# Altium PCB Monitor_Board_Model_H201.PcbDoc (part 1 of 5)
Units mm, origin at the board's own origin, x right, y up, seen from the top; angles counter-clockwise.
Board outline 50 x 40 mm, 6 copper layers (1-SIG-TOP, 2-GND, 3-PWR, 4-SIG-HOR, 5-SIG-VERT, 6-GND-BOT), stack 1.17 mm thick; 210 components, 140 nets, 699 pads, 51 vias.
Unrouted connection lines stored in the file: 491.
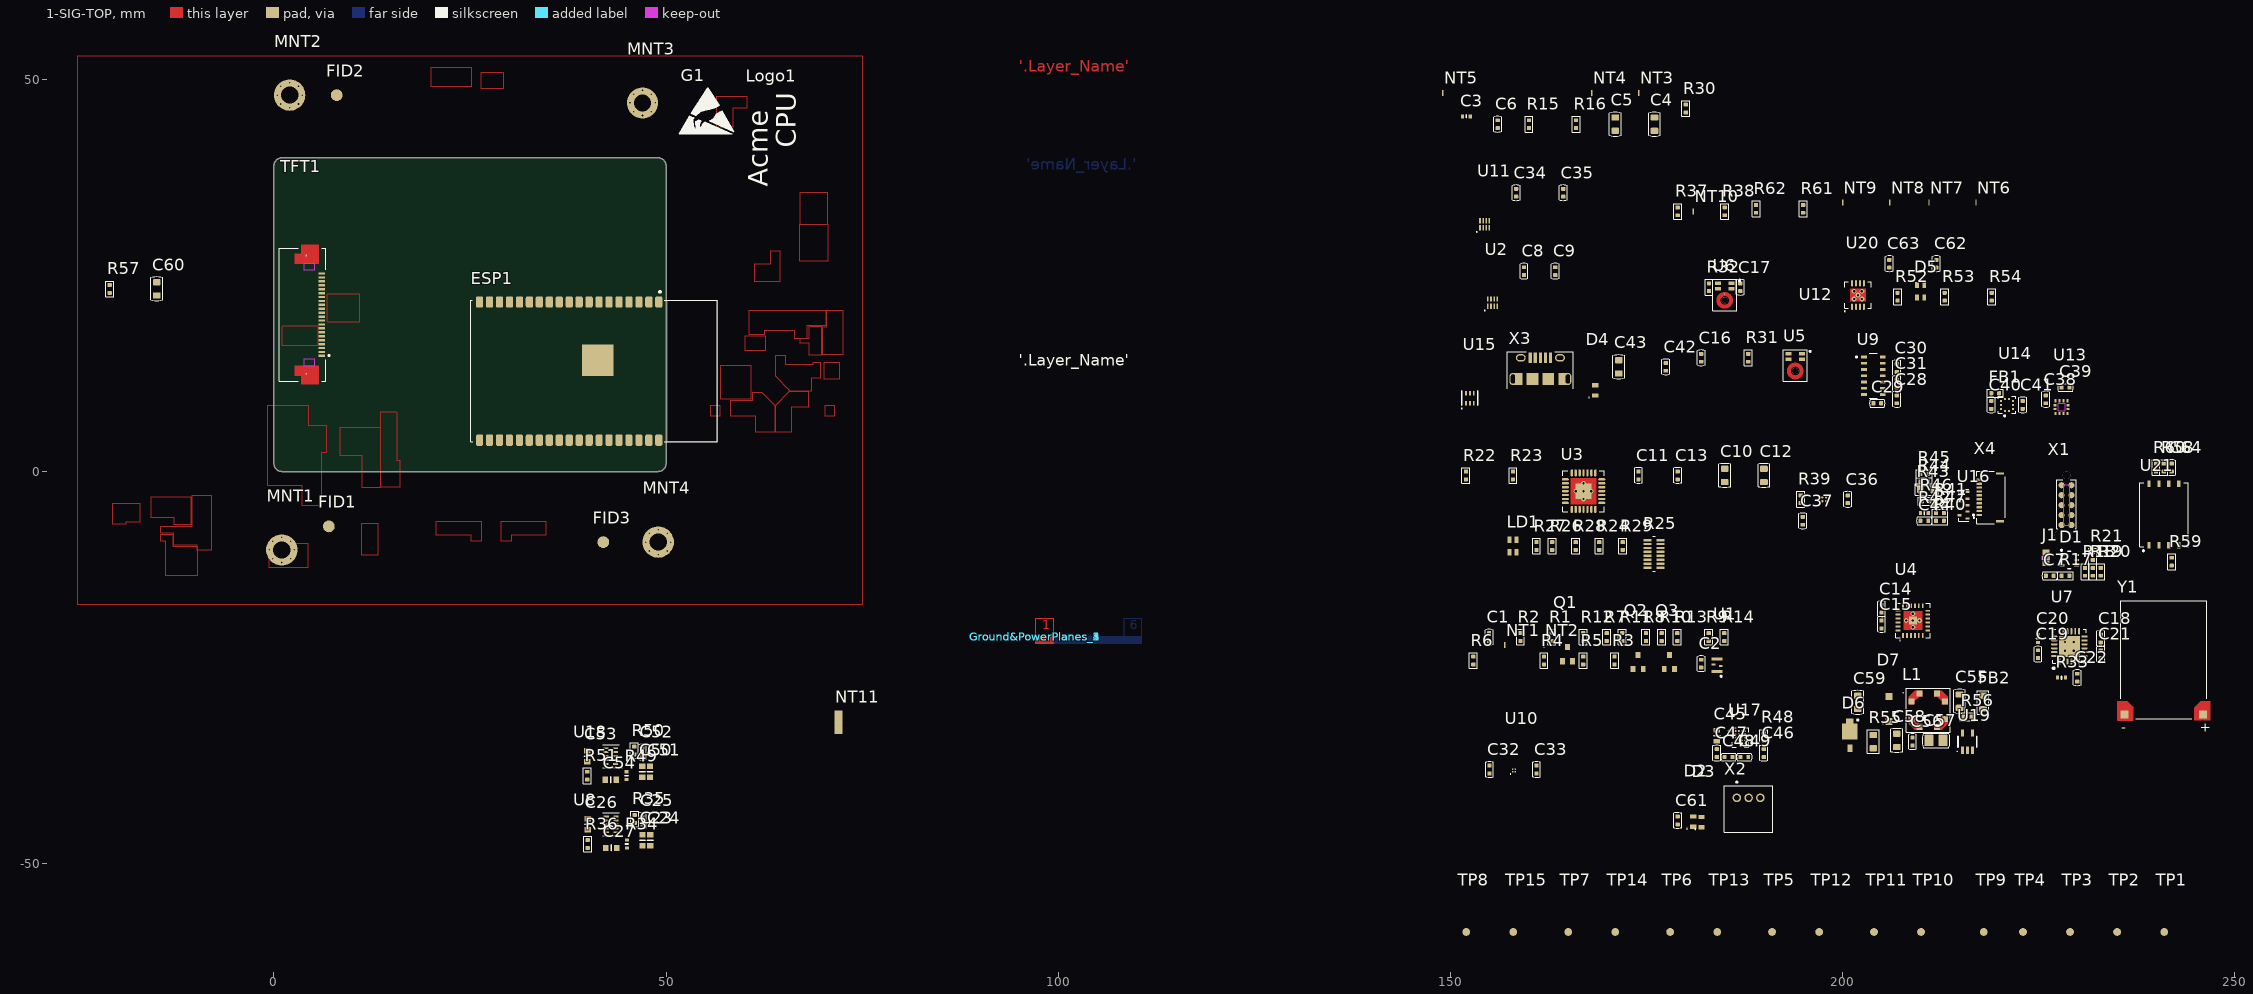
[diagram p0: 1-SIG-TOP view]
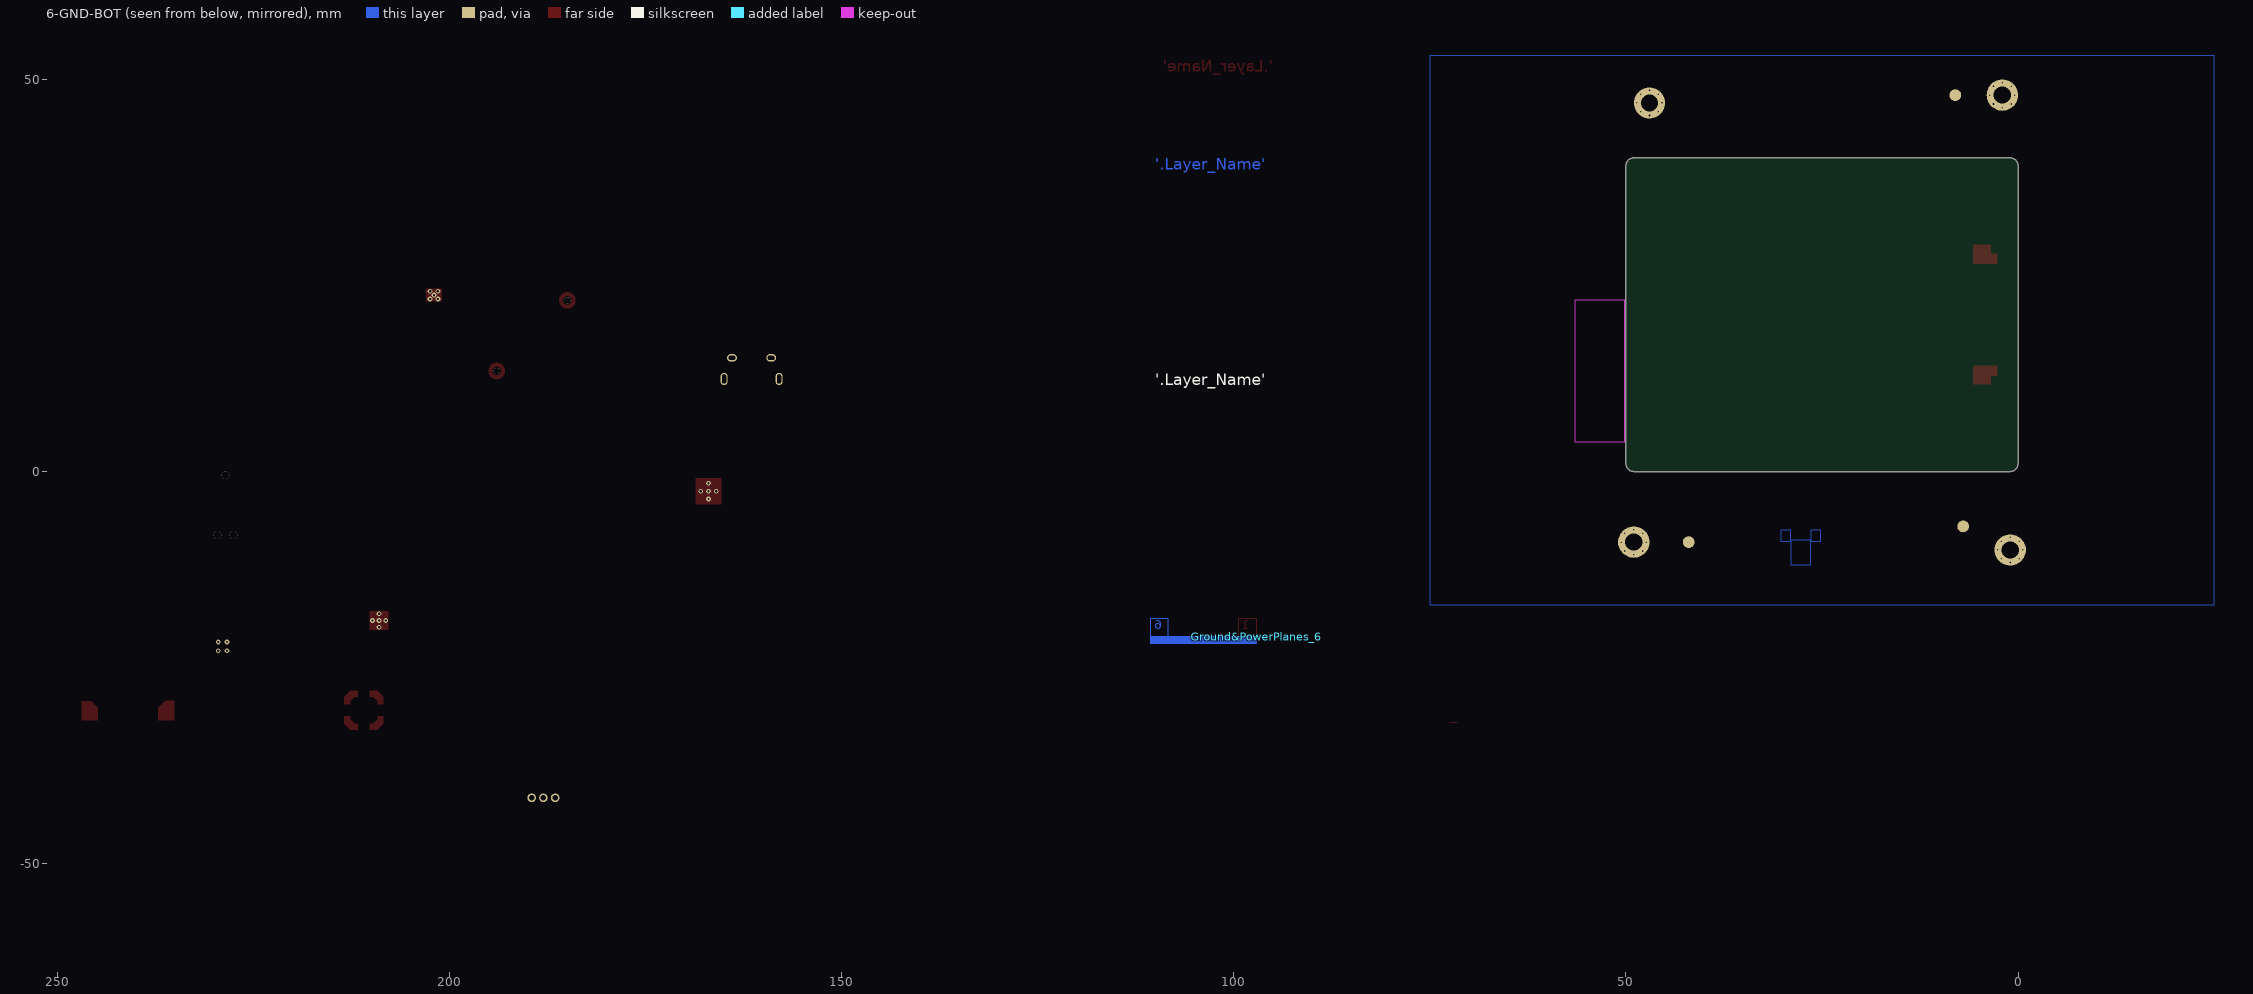
[diagram p1: 6-GND-BOT view, seen from below]
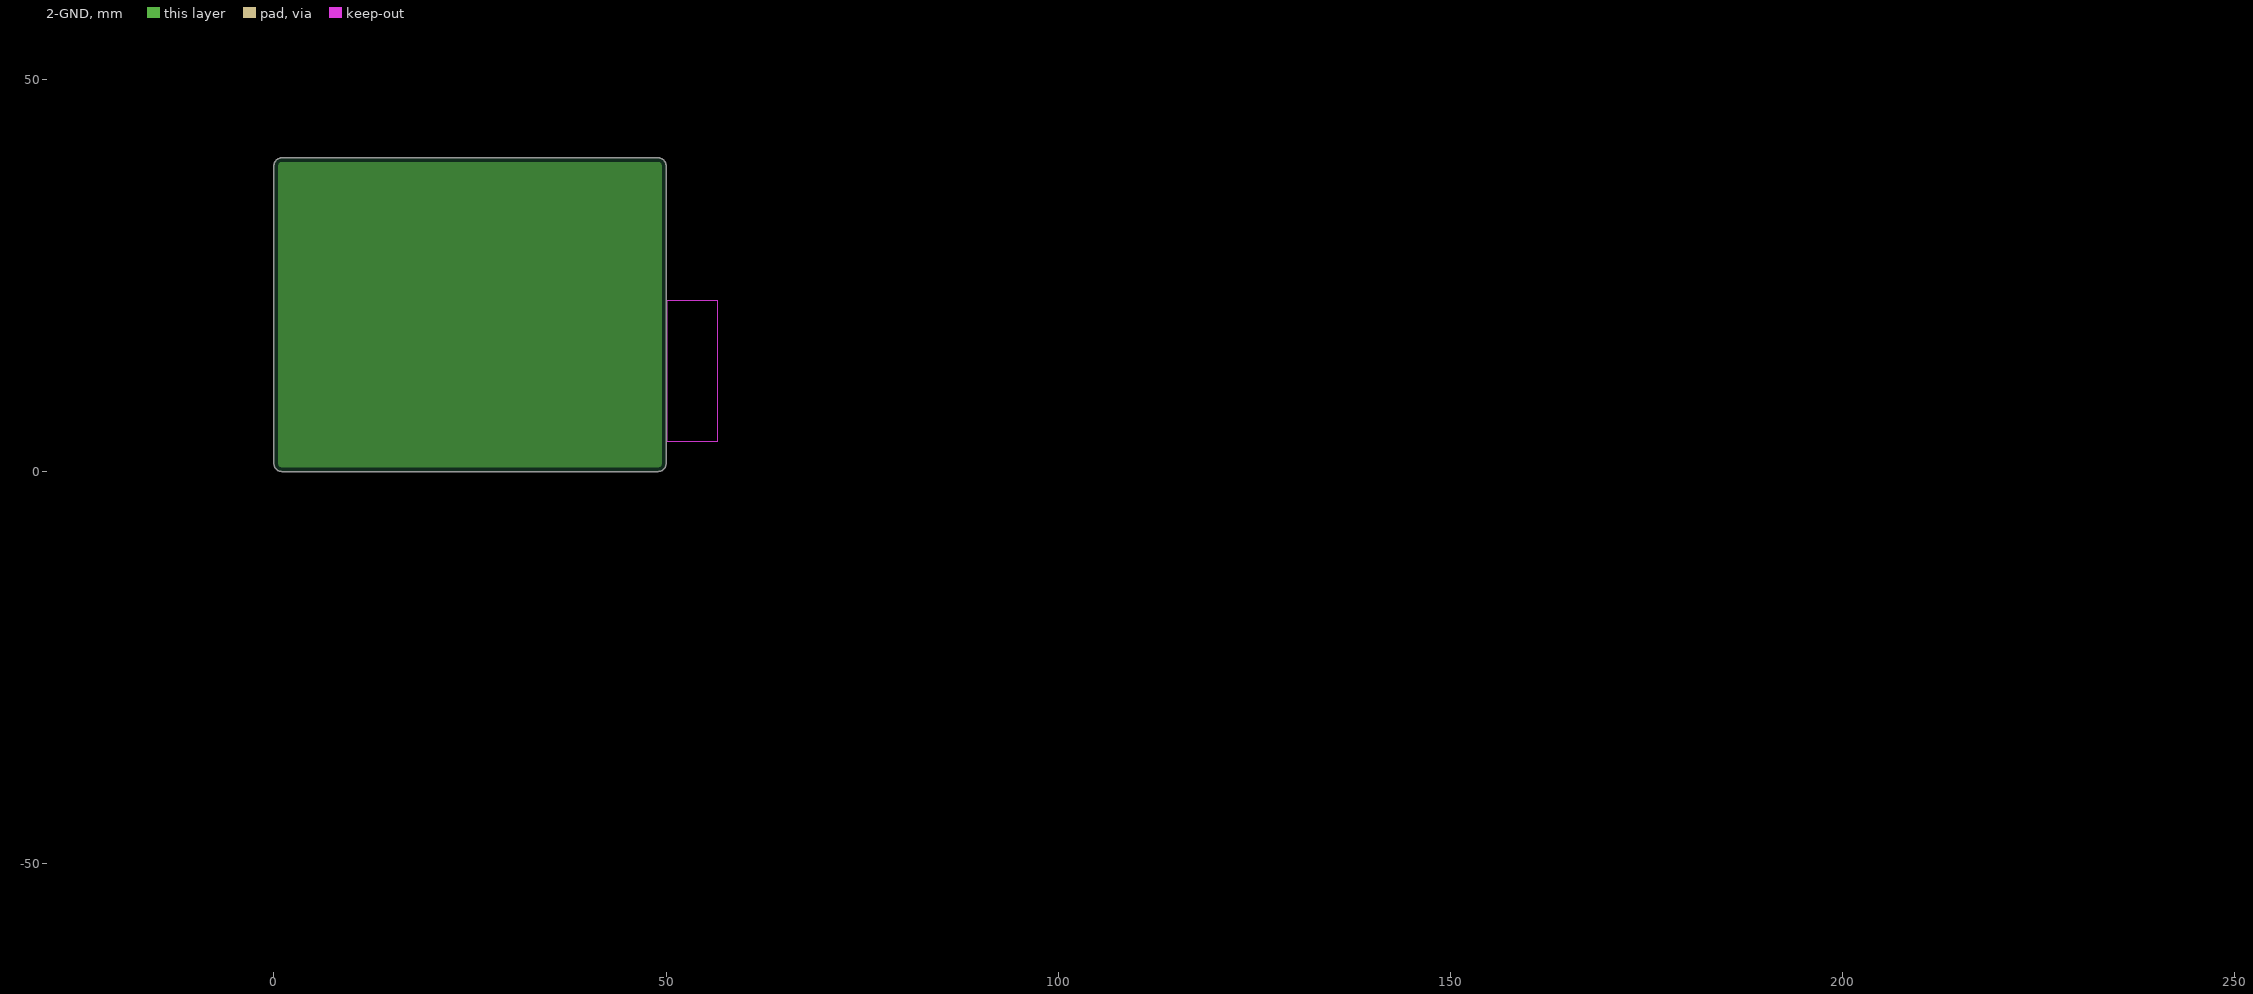
[diagram p2: 2-GND, clearances drawn from the general rule]
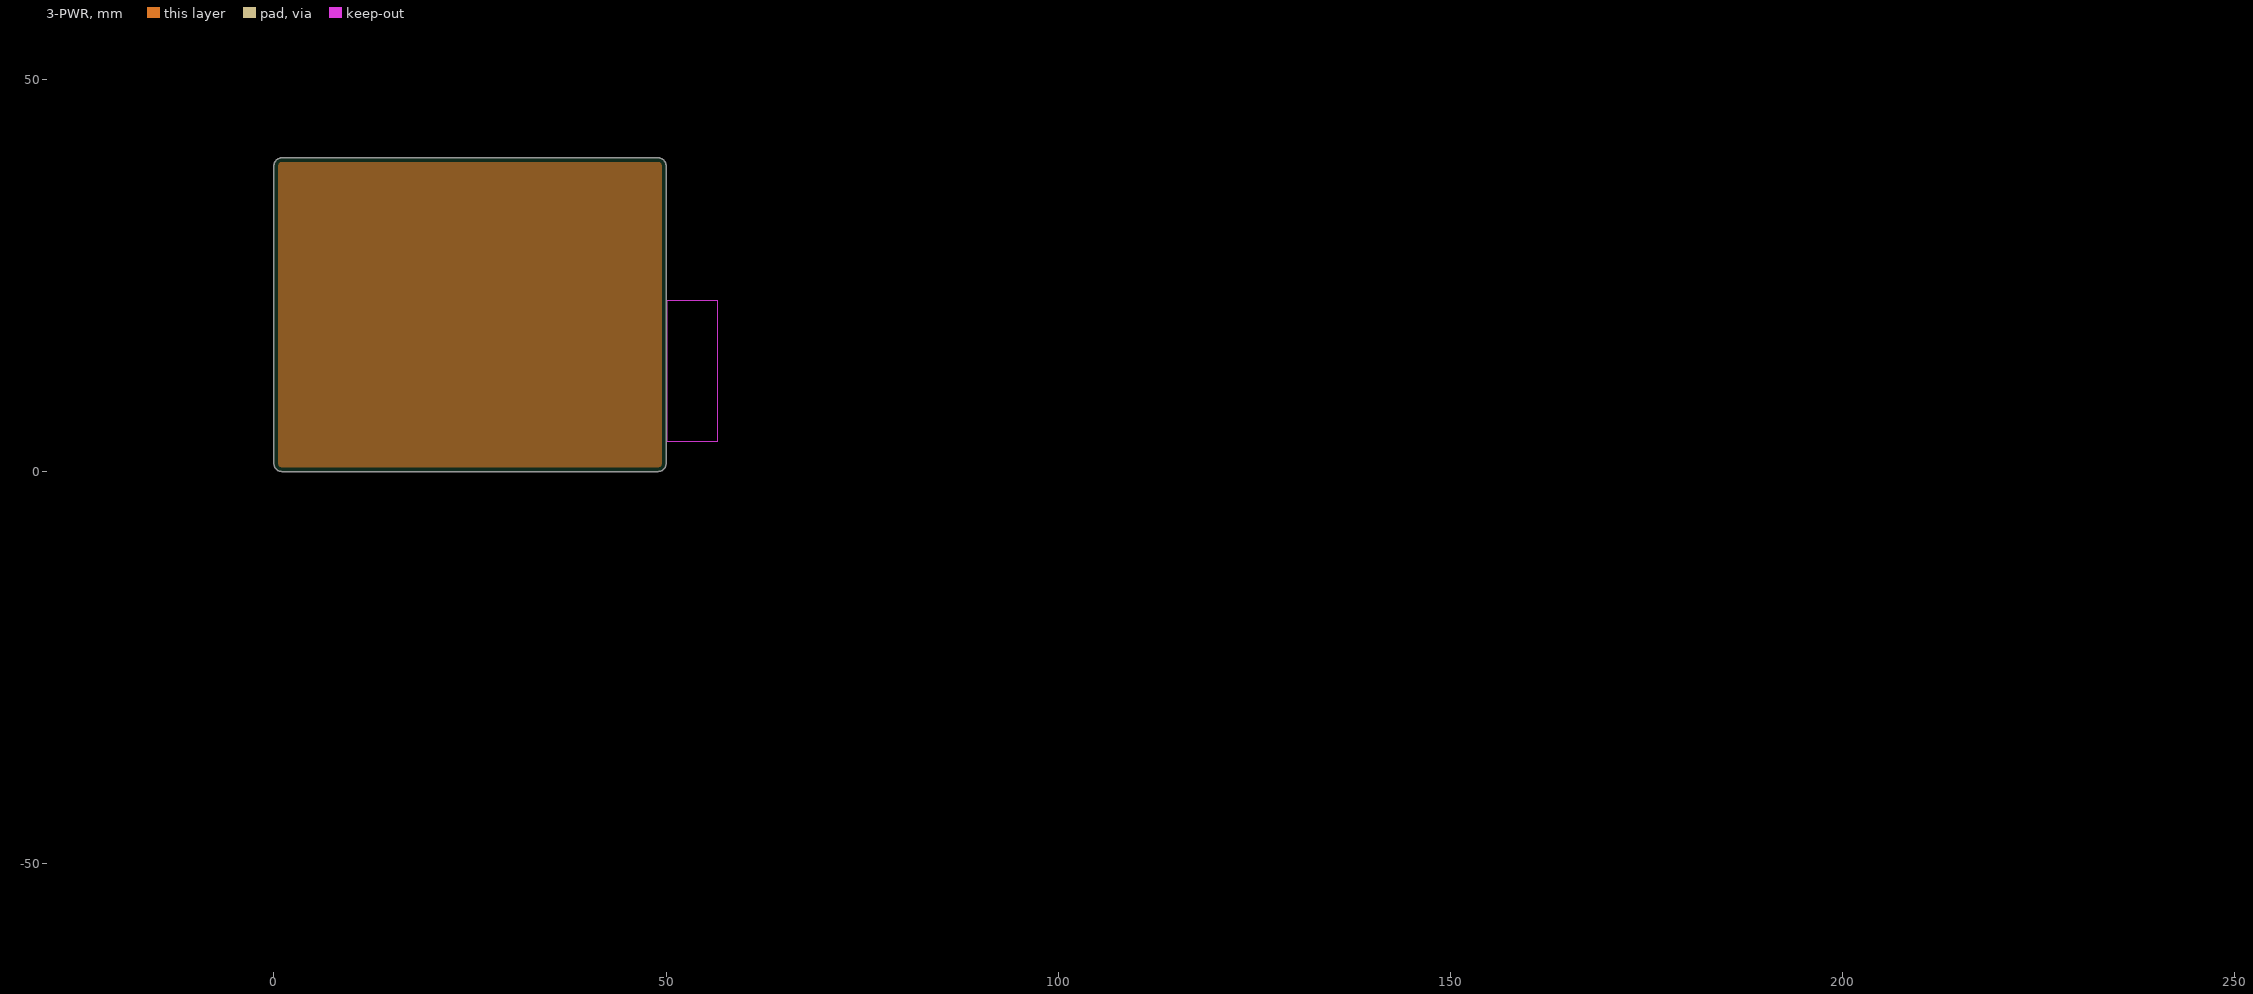
[diagram p3: 3-PWR, clearances drawn from the general rule]
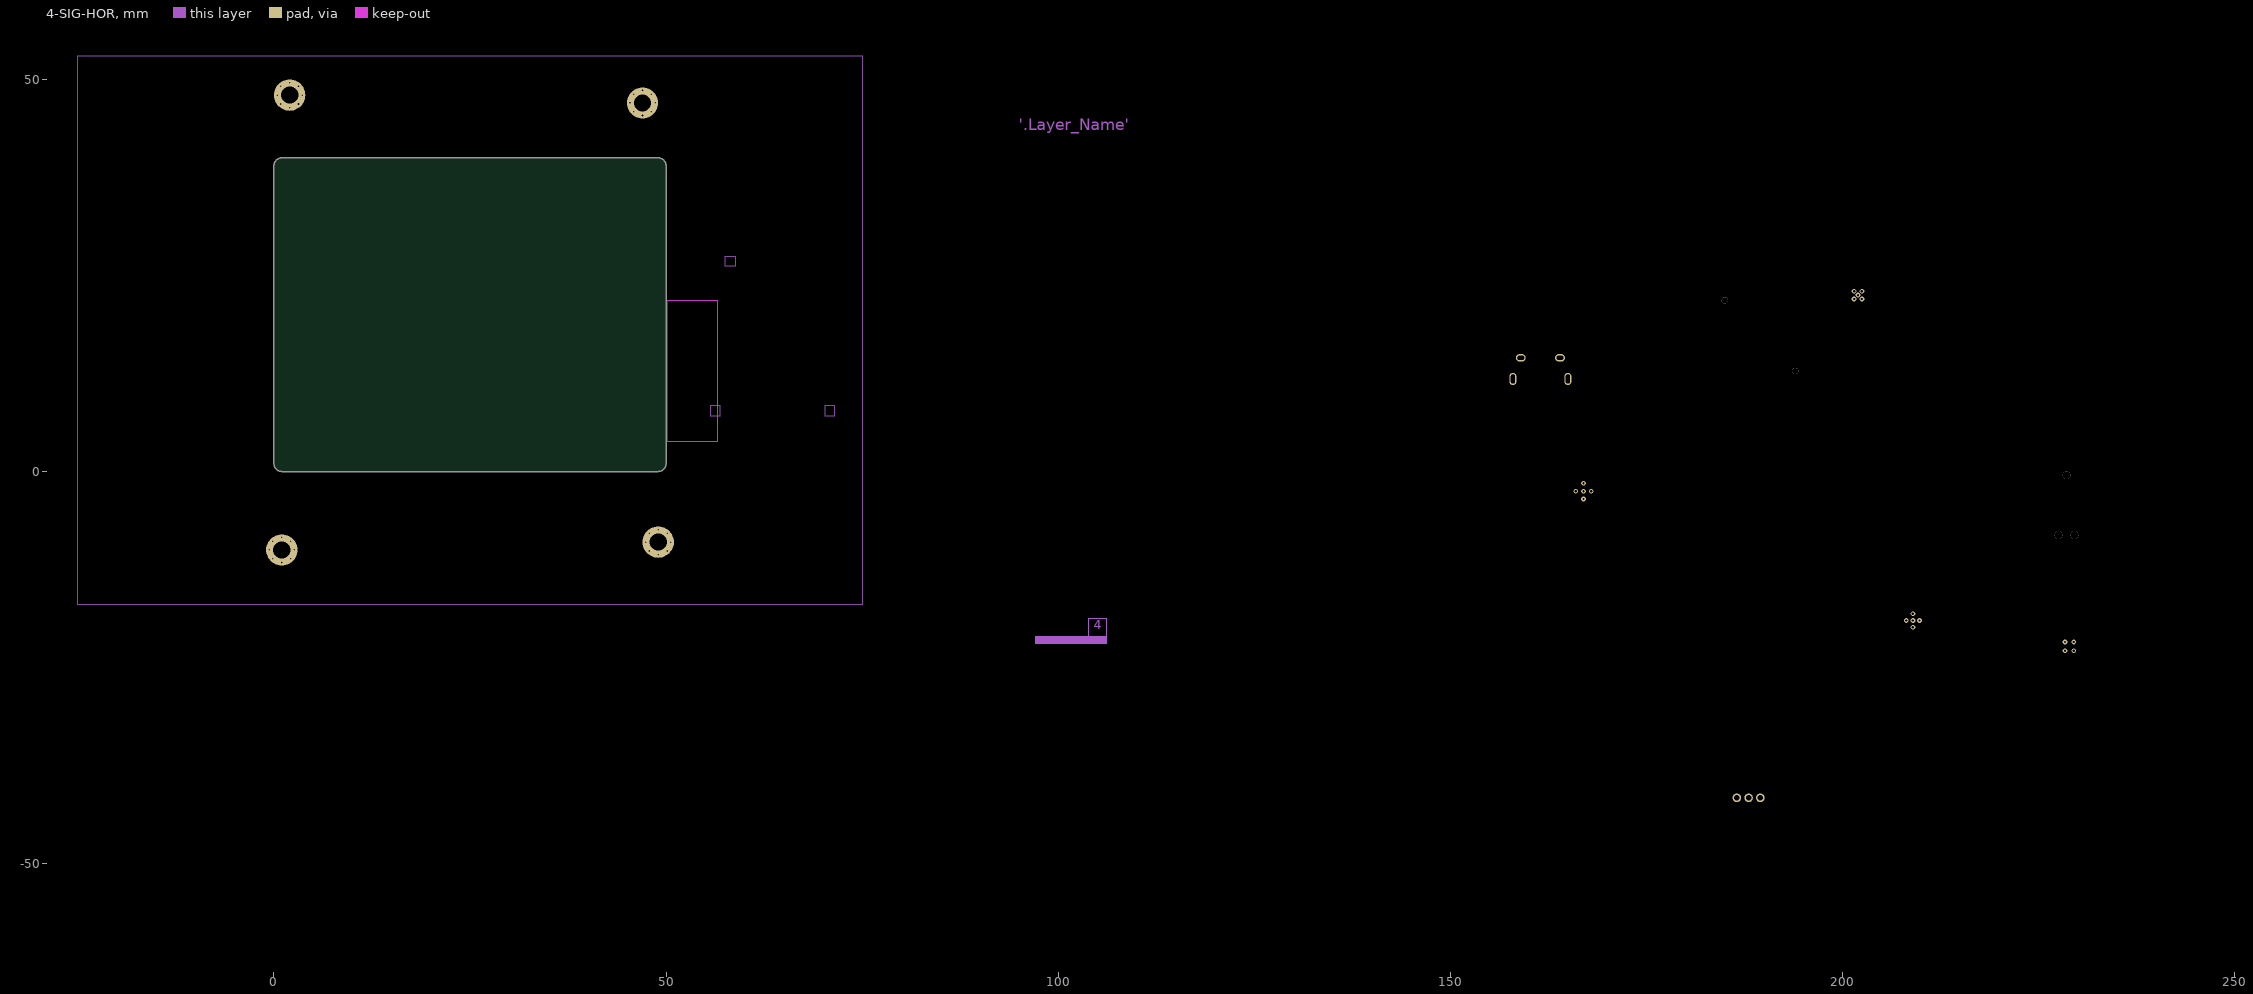
[diagram p4: 4-SIG-HOR]
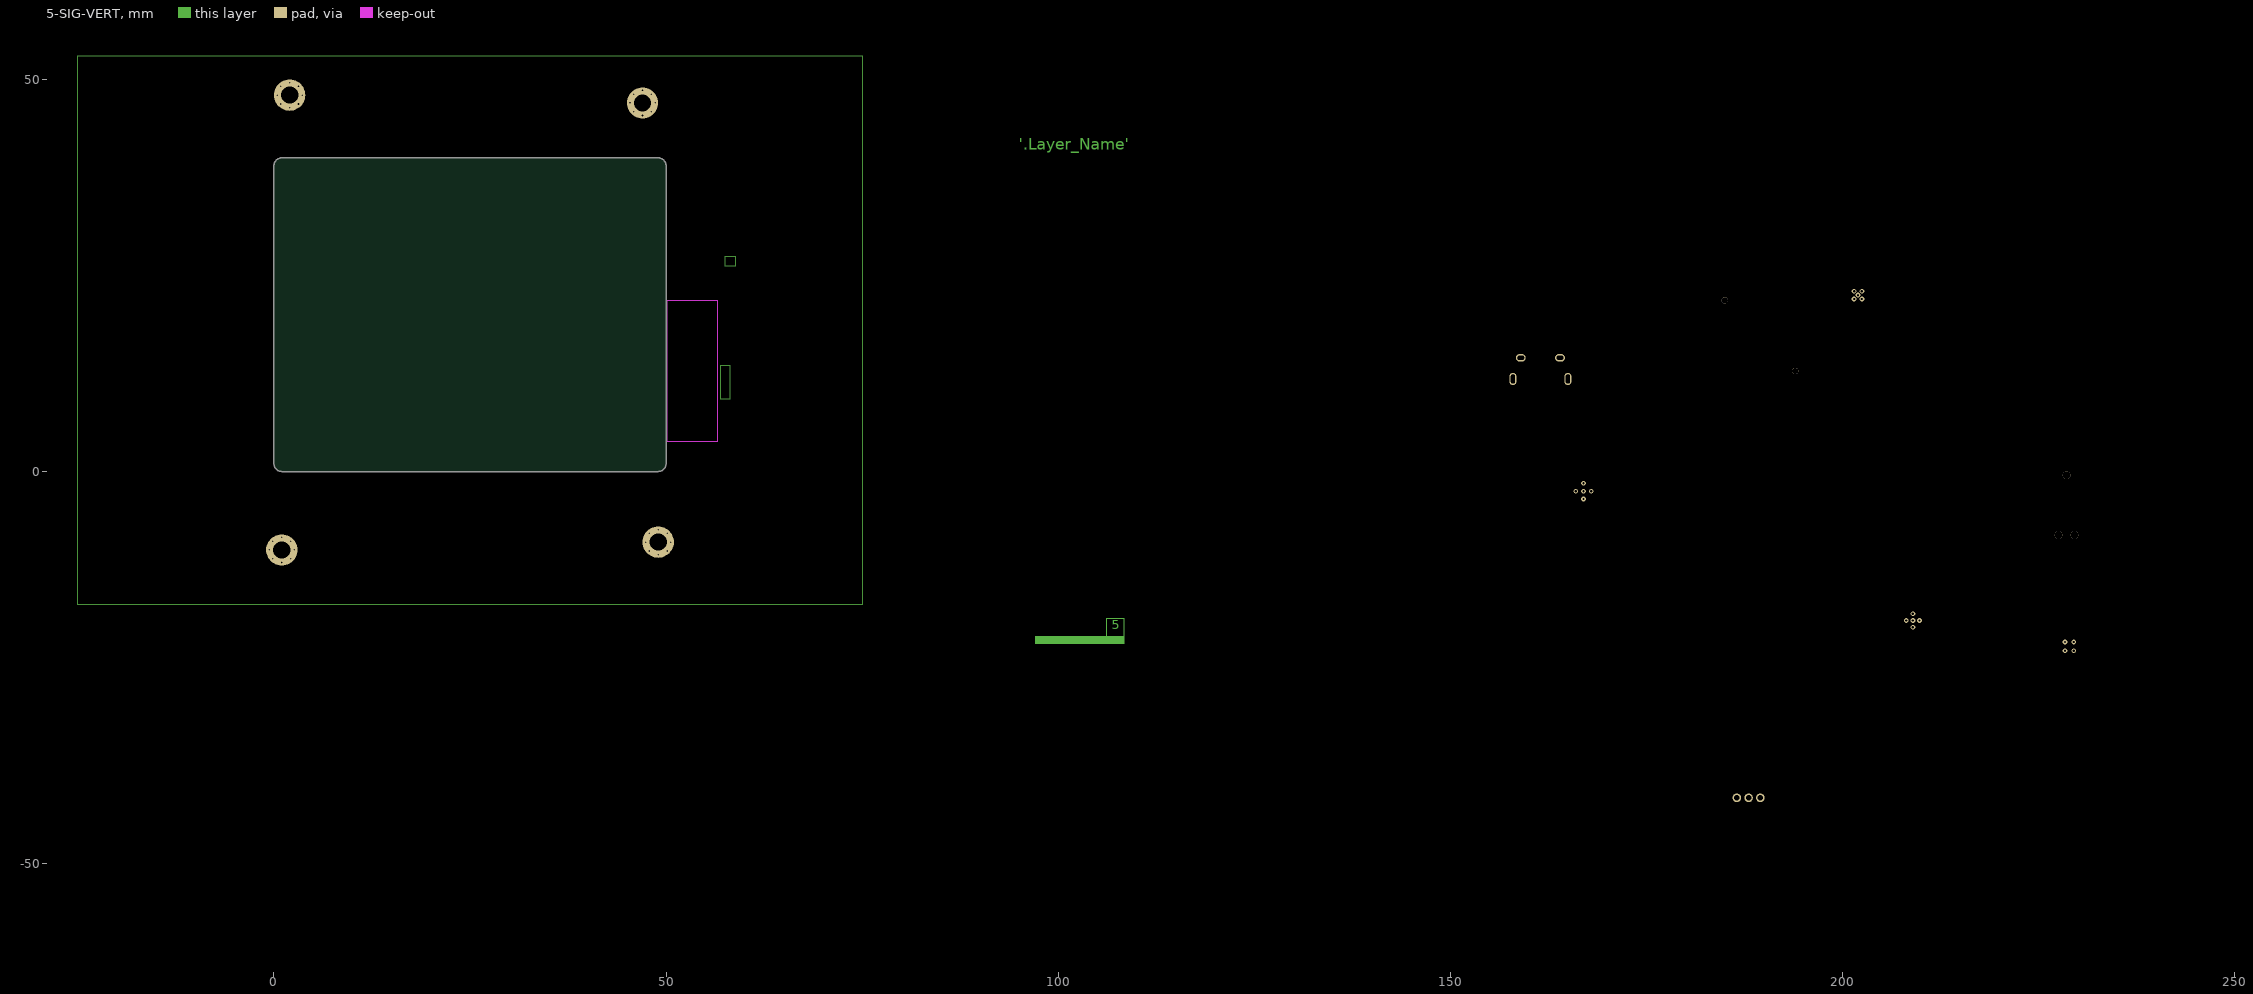
[diagram p5: 5-SIG-VERT]

## Layer stack, top to bottom
Top Solder: solder mask 0.02, Solder Resist, Dk 3.5
1-SIG-TOP: signal copper 0.035
Dielectric 1: prepreg 0.105, FR-4, Dk 4.29
2-GND: plane copper 0.035, net GND
Dielectric 3: core 0.3, FR-4, Dk 3.96
3-PWR: plane copper 0.035, net (Multiple Nets)
Dielectric 2: prepreg 0.15, FR-4, Dk 4.29
4-SIG-HOR: signal copper 0.035
Dielectric 4: core 0.3, FR-4, Dk 3.96
5-SIG-VERT: signal copper 0.035
Dielectric 5: prepreg 0.105, FR-4, Dk 4.29
6-GND-BOT: signal copper 0.035
Bottom Solder: solder mask 0.02, Solder Resist, Dk 3.5

## Board outline
0,1 0,39 cw(c1,39) 1,40 49,40 cw(c49,39) 50,39 50,1 cw(c49,1) 49,0 1,0 cw(c1,1)

## Design rules (kind name [scope] priority, off if disabled: settings)
BoardOutlineClearance BoardOutlineClearance_LayerStack [WithinRoom('PCB_Stackup')] p1: gap=0 ignorepadtopadclearanceinfootprint=FALSE
BoardOutlineClearance BoardOutlineClearance_LayerNames [WithinRoom('Layer_Names')] p2: gap=0 ignorepadtopadclearanceinfootprint=FALSE
BoardOutlineClearance BoardOutlineClearance_uSD_Slot [HasFootprintPad('5025700893','0')] p3: gap=0 ignorepadtopadclearanceinfootprint=FALSE
BoardOutlineClearance BoardOutlineClearance_USB-C_Conn [HasFootprintPad('MOLEX_2012670005','S3') or HasFootprintPad('MOLEX_2012670005','S4')] p4: gap=0 ignorepadtopadclearanceinfootprint=FALSE
BoardOutlineClearance BoardOutlineClearance_nanoSIM_Slot [HasFootprintPad('1042240820_MOL','G4') or HasFootprintPad('1042240820_MOL','G1') or ((ObjectKind = 'Fill') and HasFootprint('1042240820_MOL'))] p5: gap=0 ignorepadtopadclearanceinfootprint=FALSE
BoardOutlineClearance BoardOutlineClearance_Overlays [OnBottomSilkscreen or OnTopSilkscreen] p6: gap=0 ignorepadtopadclearanceinfootprint=FALSE
BoardOutlineClearance [All] p7: gap=0.5 ignorepadtopadclearanceinfootprint=FALSE
Clearance Clearance_InnerLayers [OnLayer('4-SIG-HOR') or OnLayer('5-SIG-VERT')] p1: gap=0.152 ignorepadtopadclearanceinfootprint=TRUE except(0.25: Arc-Hole Track-Hole SMDPad-Hole THPad-Hole Via-Hole Fill-Hole Poly-Hole Region-Hole Text-Hole)
Clearance [All] p2: gap=0.152 ignorepadtopadclearanceinfootprint=FALSE
ComponentClearance ComponentClearance_NetTie [HasFootprint('Net Tie 6x30mil')] p1: gap=0 collisioncheckmode=3 verticalgap=0 showdistances=FALSE
ComponentClearance ComponentClearance_PCB_Stackup [WithinRoom('PCB_Stackup')] p2: gap=0 collisioncheckmode=3 verticalgap=0 showdistances=FALSE
ComponentClearance ComponentClearance_TagConnect [HasFootprint('TC2030-IDC-NL') or HasFootprint('TC2050-IDC-NL')] p3: gap=0 collisioncheckmode=3 verticalgap=0 showdistances=FALSE
ComponentClearance ComponentClearance_Displays [HasFootprint('QG-2864KSWEG01_FLIPPED') vs HasFootprint('CONN_0524352271')] p4: gap=0 collisioncheckmode=3 verticalgap=0 showdistances=FALSE
ComponentClearance [All] p5: gap=0.305 collisioncheckmode=3 verticalgap=1.016 showdistances=FALSE
DiffPairsRouting [All] p1: maxlimit=0.152 minlimit=0.152 mostfreqgap=0.152 toplayer_minwidth=0.152 toplayer_maxwidth=0.152 toplayer_prefwidth=0.152 midlayer1_minwidth=0.152 midlayer1_maxwidth=0.152 midlayer1_prefwidth=0.152 midlayer2_minwidth=0.152 midlayer2_maxwidth=0.152 midlayer2_prefwidth=0.152 bottomlayer_minwidth=0.152 bottomlayer_maxwidth=0.152 bottomlayer_prefwidth=0.152 maxuncoupledlength=12.7
HoleSize [All] p1: absolutevalues=TRUE maxlimit=6.3 minlimit=0.15 maxpercent=80.000 minpercent=20.000
HoleToHoleClearance [All] p1: gap=0.254 allowstackedmicrovias=FALSE
MatchedLengths MatchedLengths_QSPI [InNetClass('QSPI')] p1: tolerance=1.27 checknetsindiffpair=FALSE checkdiffpairvsdiffpair=TRUE checkxsignals=TRUE checkothers=TRUE
MinimumAnnularRing MinimumAnnularRing_Via_Int [IsVia and not (OnTopLayer or OnBottomLayer)] p1: minimumring=0
MinimumAnnularRing [All] p2: minimumring=0.152
MinimumSolderMaskSliver [All] p1: minsoldermaskwidth=0.076
PlaneClearance [All] p1: clearance=0.25
PlaneConnect PlaneConnect_Via [IsVia] p1: planeconnectstyle=Direct reliefexpansion=0.508 reliefentries=4 reliefconductorwidth=0.254 reliefairgap=0.254
PlaneConnect PlaneConnect_HeatTrap [All] p2: pad.planeconnectstyle=Relief pad.reliefexpansion=0.152 pad.reliefentries=4 pad.reliefconductorwidth=0.152 pad.reliefairgap=0.152 via.planeconnectstyle=Direct via.reliefexpansion=0.203 via.reliefentries=4 via.reliefconductorwidth=0.254 via.reliefairgap=0.254
PolygonConnect PolygonConnect_Via [IsVia] p1: connectstyle=Direct reliefconductorwidth=0.254 reliefentries=4 polygonreliefangle="90 Angle" airgapwidth=0.254
PolygonConnect PolygonConnect_TestPoints [InComponentClass('TestPoint')] p2: connectstyle=Direct reliefconductorwidth=0.254 reliefentries=4 polygonreliefangle="90 Angle" airgapwidth=0.254
PolygonConnect PolygonConnect_ThermPads [HasFootprintPad('DFN65P100X40-4N','5')] p3: connectstyle=Direct reliefconductorwidth=0.254 reliefentries=4 polygonreliefangle="90 Angle" airgapwidth=0.254
PolygonConnect PolygonConnect_BG95_GND [HasFootprint('BG95') and (InNet('GND') or InNetClass('BG95_PWR'))] p4: connectstyle=Direct reliefconductorwidth=0.254 reliefentries=4 polygonreliefangle="90 Angle" airgapwidth=0.254
PolygonConnect [All] p5: thpad.connectstyle=Relief thpad.reliefconductorwidth=0.381 thpad.reliefentries=4 thpad.polygonreliefangle="90 Angle" thpad.airgapwidth=0.203 smdpad.connectstyle=Relief smdpad.reliefconductorwidth=0.254 smdpad.reliefentries=4 smdpad.polygonreliefangle="90 Angle" smdpad.airgapwidth=0.203 via.connectstyle=Direct via.reliefconductorwidth=0.254 via.reliefentries=4 via.polygonreliefangle="90 Angle" via.airgapwidth=0.254
RoomDefinition PCB_Stackup [False] p1: confinementstyle=ConfineIn formatcopy=TRUE lockcomponents=FALSE outline 96,-18 112,-18 112,-23 96,-23
RoomDefinition VLT2 [InComponentClass('VLT2')] p2: confinementstyle=ConfineIn formatcopy=TRUE lockcomponents=FALSE outline 152.4,29.55 165.4,29.55 165.4,37.55 152.4,37.55
RoomDefinition VLT1 [InComponentClass('VLT1')] p3: confinementstyle=ConfineIn formatcopy=TRUE lockcomponents=FALSE outline 153.4,19.55 164.4,19.55 164.4,27.55 153.4,27.55
RoomDefinition USB [InComponentClass('USB')] p4: confinementstyle=ConfineIn formatcopy=TRUE lockcomponents=FALSE outline 150.5,7.35 178.5,7.35 178.5,16.35 150.5,16.35
RoomDefinition U_CP2102N_USB-to-UART_Bridge [InComponentClass('U_CP2102N_USB-to-UART_Bridge')] p5: confinementstyle=ConfineIn formatcopy=TRUE lockcomponents=FALSE outline 151.045,-15.71 192.045,-15.71 192.045,2.29 151.045,2.29
RoomDefinition MIC2 [InComponentClass('MIC2')] p6: confinementstyle=ConfineIn formatcopy=TRUE lockcomponents=FALSE outline 171,19.5 188,19.5 188,25.5 171,25.5
RoomDefinition MIC1 [InComponentClass('MIC1')] p7: confinementstyle=ConfineIn formatcopy=TRUE lockcomponents=FALSE outline 181,10.5 197,10.5 197,16.5 181,16.5
RoomDefinition MCU [InComponentClass('MCU')] p8: confinementstyle=ConfineIn formatcopy=TRUE lockcomponents=FALSE outline 152,-27 186,-27 186,-17 152,-17
RoomDefinition LSW [InComponentClass('LSW')] p9: confinementstyle=ConfineIn formatcopy=TRUE lockcomponents=FALSE outline 193,-8 202,-8 202,2 193,2
RoomDefinition K_PAD [InComponentClass('K_PAD')] p10: confinementstyle=ConfineIn formatcopy=TRUE lockcomponents=FALSE outline 208,-8 222,-8 222,2 208,2
RoomDefinition JTAG [InComponentClass('JTAG')] p11: confinementstyle=ConfineIn formatcopy=TRUE lockcomponents=FALSE outline 224,-15 235,-15 235,2 224,2
RoomDefinition HRS1 [InComponentClass('HRS1')] p12: confinementstyle=ConfineIn formatcopy=TRUE lockcomponents=FALSE outline 201,7 208,7 208,16 201,16
RoomDefinition HRMI [InComponentClass('HRMI')] p13: confinementstyle=ConfineIn formatcopy=TRUE lockcomponents=FALSE outline 171,31.178 186,31.178 186,36.178 171,36.178
RoomDefinition HRME [InComponentClass('HRME')] p14: confinementstyle=ConfineIn formatcopy=TRUE lockcomponents=FALSE outline 188,31.5 196,31.5 196,35.5 188,35.5
RoomDefinition FLASH [InComponentClass('FLASH')] p15: confinementstyle=ConfineIn formatcopy=TRUE lockcomponents=FALSE outline 237.045,-13.21 245.045,-13.21 245.045,2.79 237.045,2.79
RoomDefinition DIO [InComponentClass('DIO')] p16: confinementstyle=ConfineIn formatcopy=TRUE lockcomponents=FALSE outline 202,-22 216,-22 216,-15.5 202,-15.5
RoomDefinition CODEC [InComponentClass('CODEC')] p17: confinementstyle=ConfineIn formatcopy=TRUE lockcomponents=FALSE outline 224,-28 234,-28 234,-17 224,-17
RoomDefinition BMP388 [InComponentClass('BMP388')] p18: confinementstyle=ConfineIn formatcopy=TRUE lockcomponents=FALSE outline 218.045,6.29 224.045,6.29 224.045,14.29 218.045,14.29
RoomDefinition BMA253 [InComponentClass('BMA253')] p19: confinementstyle=ConfineIn formatcopy=TRUE lockcomponents=FALSE outline 225,6 230,6 230,14 225,14
RoomDefinition BL_PS [InComponentClass('BL_PS')] p20: confinementstyle=ConfineIn formatcopy=TRUE lockcomponents=FALSE outline 199,-39 220,-39 220,-25 199,-25
RoomDefinition BC [InComponentClass('BC')] p21: confinementstyle=ConfineIn formatcopy=TRUE lockcomponents=FALSE outline 183.045,-38.11 191.045,-38.11 191.045,-31.11 183.045,-31.11
RoomDefinition +3V3_PS2 [InComponentClass('+3V3_PS2')] p22: confinementstyle=ConfineIn formatcopy=TRUE lockcomponents=FALSE outline 37,-41 49,-41 49,-34 37,-34
RoomDefinition +3V3_PS1 [InComponentClass('+3V3_PS1')] p23: confinementstyle=ConfineIn formatcopy=TRUE lockcomponents=FALSE outline 37.045,-49.71 49.045,-49.71 49.045,-42.71 37.045,-42.71
RoomDefinition +1V8_PS1 [InComponentClass('+1V8_PS1')] p24: confinementstyle=ConfineIn formatcopy=TRUE lockcomponents=FALSE outline 154,-40 162,-40 162,-32 154,-32
RoomDefinition Layer_Names [False] p25: confinementstyle=ConfineIn formatcopy=TRUE lockcomponents=FALSE outline 92.5,53 112.5,53 112.5,35.5 92.5,35.5
RoomDefinition LED_DRV [InComponentClass('LED_DRV')] p26: confinementstyle=ConfineIn formatcopy=TRUE lockcomponents=FALSE outline 199,19.5 213,19.5 213,28.5 199,28.5
RoutingVias [All] p1: holewidth=0.15 width=0.5 viastyle="Through Hole" minholewidth=0.15 minwidth=0.5 maxholewidth=0.5 maxwidth=0.7
SilkToSilkClearance [All] p1: silktosilkclearance=0.025
SilkToSolderMaskClearance [IsPad] p1: minsilkscreentomaskgap=0.102 clearancetoexposedcopper=FALSE
SolderMaskExpansion [All] p1: expansion=0.051
Width [All] p1: maxlimit=5.08 minlimit=0.152 preferedwidth=0.254
21 further rules are at their usual default settings.

## Classes and differential pairs
channel class TXS0102_I2C_Bus_Voltage_Translator: VLT1 VLT2
channel class TPSM82822_2A_Buck_Module: +3V3_PS1 +3V3_PS2
channel class IM69D130_MEMS_Microphone: MIC1 MIC2
net class USB: USB.D_N USB.D_P USB_CONN_N USB_CONN_P
net class DIO_[0..15]: DIO_0 DIO_1 DIO_2 DIO_3 DIO_4 DIO_5 DIO_6 DIO_7 DIO_8 DIO_9 DIO_10 DIO_11 DIO_12 DIO_13 DIO_14 DIO_15
component class VLT2: C34 C35 U11
component class VLT1: C8 C9 U2
component class USB: C42 C43 D4 U15 X3
component class U_ESP32-WROOM32D_Module: Q1 Q2 Q3 R1 R2 R3 R4 R7 R8 R13 R14 R37 R38
component class "Net Tie": NT1 NT2 NT3 NT4 NT5 NT6 NT7 NT8 NT9 NT10 NT11
component class MIC2: C17 R32 U6
component class MIC1: C16 R31 U5
component class LSW: C36 C37 R39 U12
component class HRS1: C28 C29 C30 C31 U9
component class HRMI: NT10 R37 R38
component class HRME: R61 R62
component class DIO: C14 C15 U4
component class CODEC: C18 C19 C20 C21 C22 R33 U7
component class BMP388: C40 C41 FB1 U14
component class BMA253: C38 C39 U13
component class +3V3_PS1: C23 C24 C25 C26 C27 R34 R35 R36 U8
component class +1V8_PS1: C32 C33 U10
component class TestPoint: TP1 TP2 TP3 TP4 TP5 TP6 TP7 TP8 TP9 TP10 TP11 TP12 TP13 TP14 TP15 TP25 TP26 TP?
component class FiducialMark: FID1 FID2 FID3
component class MCU: C1 C2 NT1 NT2 Q1 Q2 Q3 R1 R2 R3 R4 R5 R6 R7 R8 R9 R10 R11 R12 R13 R14 U1
component class U_CP2102N_USB-to-UART_Bridge: C10 C11 C12 C13 LD1 R22 R23 R24 R25 R26 R27 R28 R29 U3
component class K_PAD: C44 R40 R41 R42 R43 R44 R45 R46 R47 U16 X4
component class +3V3_PS2: C50 C51 C52 C53 C54 R49 R50 R51 U18
component class JTAG: C7 D1 J1 R17 R18 R19 R20 R21 X1
component class BL_PS: C55 C56 C57 C58 C59 D6 D7 FB2 L1 R55 R56 U19
net class GPIO[0..36]: GPIO0 GPIO1 GPIO2 GPIO3 GPIO4 GPIO5 GPIO12 GPIO13 GPIO14 GPIO15 GPIO18 GPIO19 GPIO21 GPIO22 GPIO23 GPIO25 GPIO26 GPIO27 GPIO32 GPIO33 GPIO34 GPIO35 GPIO36 GPIO39
net class QSPI: GPIO5 GPIO18 GPIO19 GPIO23 QSPI.IO2/WP QSPI.IO3/HD
component class PCB_FEATURE: Logo1
component class BC: C45 C46 C47 C48 C49 R48 U17
component class FLASH: C64 R58 R59 R60 U21
component class LED_DRV: C62 C63 U20
differential pair USB_CONN: +USB_CONN_P -USB_CONN_N
differential pair USB.D: +USB.D_P -USB.D_N

## Components (designator, comment, footprint, x,y, rotation, side; value= is the part's Value field where it differs from the comment)
C1 "CAP CER 0.1UF 50V X7R 0402" C0402 154.955,-21.112 r90 top
C2 "CAP CER 0.1UF 50V X7R 0402" C0402 182,-24.5 r90 top
C3 "CAP CER 1UF 6.3V X5R 0402" CAP_0402 152.045,45.29 r0 top (schematic designator C1)
C4 "CAP CER 10UF 16V X5R 0603" C0603 176.045,44.29 r90 top (schematic designator C2)
C5 "CAP CER 10UF 16V X5R 0603" C0603 171.045,44.29 r90 top (schematic designator C3)
C6 "CAP CER 0.1UF 16V X7R 0402" C0402 156.045,44.29 r90 top (schematic designator C4)
C7 "CAP CER 1UF 6.3V X5R 0402" C0402 226.455,-13.29 r0 top (schematic designator C1)
C8 "CGA2B3X7R1H104K050BB" C0402 159.4,25.55 r90 top (schematic designator C1)
C9 "CGA2B3X7R1H104K050BB" C0402 163.4,25.55 r90 top (schematic designator C2)
C10 "CAP CER 4.7UF 16V X5R 0603" C0603 185,-0.5 r90 top (schematic designator C1)
C11 "CAP CER 0.1UF 16V X7R 0402" C0402 174,-0.5 r90 top (schematic designator C2)
C12 "CAP CER 4.7UF 16V X5R 0603" C0603 190,-0.5 r90 top (schematic designator C3)
C13 "CAP CER 0.1UF 16V X7R 0402" C0402 179,-0.5 r90 top (schematic designator C4)
C14 "CAP CER 2.2UF 6.3V X5R 0402" C0402 205,-17.5 r90 top (schematic designator C1)
C15 "CAP CER 0.1UF 50V X7R 0402" C0402 205,-19.5 r270 top (schematic designator C2)
C16 "CAP CER 0.1UF 50V X7R 0402" C0402 182,14.5 r90 top (schematic designator C3)
C17 "CAP CER 0.1UF 50V X7R 0402" C0402 187,23.5 r90 top (schematic designator C3)
C18 "CAP CER 10nF 25V X7R 10% 0402" C0402 232.955,-21.29 r90 top (schematic designator C4)
C19 "CAP CER 10PF 50V C0G/NP0 0402" C0402 224.955,-23.29 r90 top (schematic designator C5)
C20 "C 100pF 50V C0G, NP0 0402" CAP_0402 224.955,-21.29 r90 top (schematic designator C6)
C21 "CAP CER 10nF 25V X7R 10% 0402" C0402 232.955,-23.29 r90 top (schematic designator C7)
C22 "CAP CER 0.1UF 50V X7R 0402" C0402 229.955,-26.29 r90 top (schematic designator C8)
C23 "CAP CER 10UF 16V X5R 0603" CAPC1608X08N_0603 47,-47 r90 top (schematic designator C1)
C24 "CAP CER 10UF 16V X5R 0603" CAPC1608X08N_0603 48,-47 r90 top (schematic designator C2)
C25 "CAP CER 100PF 50V C0G/NPO 0402" C0402 47,-44.5 r90 top (schematic designator C3)
C26 "CAP CER 10UF 16V X5R 0603" CAPC1608X08N_0603 40,-45 r270 top (schematic designator C4)
C27 "CAP CER 10UF 16V X5R 0603" CAPC1608X08N_0603 43,-48 r180 top (schematic designator C5)
C28 "CAP CER 0.1UF 50V X7R 0402" C0402 206.955,9.21 r90 top (schematic designator C9)
C29 "CAP CER 4.7UF 6.3V X5R 0402" C0402 204.455,8.71 r180 top (schematic designator C10)
C30 "CAP CER 0.1UF 50V X7R 0402" C0402 206.955,13.21 r90 top (schematic designator C11)
C31 "CAP CER 10UF 6.3V X5R 0402" C0402 206.955,11.21 r90 top (schematic designator C12)
C32 "CAP CER 2.2UF 6.3V X5R 0402" C0402 155,-38 r90 top (schematic designator C1)
C33 "CAP CER 2.2UF 6.3V X5R 0402" C0402 161,-38 r90 top (schematic designator C2)
C34 "CGA2B3X7R1H104K050BB" C0402 158.4,35.55 r90 top (schematic designator C1)
C35 "CGA2B3X7R1H104K050BB" C0402 164.4,35.55 r90 top (schematic designator C2)
C36 "CAP CER 1UF 16V X5R 0402" C0402 200.705,-3.54 r90 top (schematic designator C1)
C37 "CAP CER 0.1UF 50V X7R 0402" C0402 194.955,-6.29 r90 top (schematic designator C2)
C38 "CAP CER 0.1UF 50V X7R 0402" C0402 225.955,9.21 r270 top (schematic designator C1)
C39 "CAP CER 0.1UF 50V X7R 0402" C0402 228.455,10.71 r180 top (schematic designator C2)
C40 "CAP CER 0.1UF 16V X7R 0402" C0402 219,8.5 r270 top (schematic designator C1)
C41 "CAP CER 0.1UF 16V X7R 0402" C0402 223,8.5 r90 top (schematic designator C2)
C42 "Value" C0402 177.5,13.35 r90 top (schematic designator C13)
C43 "Value" 0603C 171.5,13.35 r90 top (schematic designator C14)
C44 "CAP CER 0.1UF 50V X7R 0402" C0402 210.455,-6.29 r180 top (schematic designator C15)
C45 "CAP CER 1UF 25V X5R 0603" CAP_0603 184,-33.7 r90 top (schematic designator C16)
C46 "CAP CER 10UF 6.3V X5R 0402" C0402 190,-35.9 r90 top (schematic designator C17)
C47 "CAP CER 4.7UF 6.3V X5R 0402" C0402 184,-35.9 r90 top (schematic designator C18)
C48 "CAP CER 10UF 6.3V X5R 0402" C0402 185.5,-36.4 r180 top (schematic designator C19)
C49 "CAP CER 2.2UF 6.3V X5R 0402" C0402 187.5,-36.4 r180 top (schematic designator C20)
C50 "CAP CER 10UF 16V X5R 0603" CAPC1608X08N_0603 46.955,-38.29 r90 top (schematic designator C1)
C51 "CAP CER 10UF 16V X5R 0603" CAPC1608X08N_0603 47.955,-38.29 r90 top (schematic designator C2)
C52 "CAP CER 100PF 50V C0G/NPO 0402" C0402 46.955,-35.79 r90 top (schematic designator C3)
C53 "CAP CER 10UF 16V X5R 0603" CAPC1608X08N_0603 39.955,-36.29 r270 top (schematic designator C4)
C54 "CAP CER 10UF 16V X5R 0603" CAPC1608X08N_0603 42.955,-39.29 r180 top (schematic designator C5)
C55 "CAP CER 10UF 16V X5R 0603" C0603 214.955,-29.29 r90 top (schematic designator C1)
C56 "CAP CER 0.1UF 50V X7R 0402" C0402 208.955,-34.44 r90 top (schematic designator C2)
C57 "CAP CER 10UF 16V X7R 0805" C0805 211.955,-34.29 r180 top (schematic designator C3)
C58 "CAP CER 10UF 16V X5R 0603" C0603 206.955,-34.29 r90 top (schematic designator C4)
C59 "CAP CER 10UF 16V X5R 0603" C0603 201.955,-29.44 r90 top (schematic designator C5)
C60 "CAP CER 10UF 16V X5R 0603" C0603 -14.955,23.29 r90 top (schematic designator C1)
C61 "CAP CER 0.1UF 16V X7R 0402" C0402 179,-44.5 r90 top (schematic designator C2)
C62 "CAP CER 1UF 16V X5R 0402" C0402 212,26.5 r90 top (schematic designator C1)
C63 "CAP CER 0.1UF 50V X7R 0402" C0402 206,26.5 r90 top (schematic designator C2)
C64 "CAP CER 0.1UF 50V X7R 0402" C0402 242,0.5 r270 top (schematic designator C1)
D1 "SMF05CT1G" SOT363_SOP65P210X265-6N 228.955,-11.29 r0 top
D2 "ESDA7P120-1U1M" ST_QFN_1610 181,-44.65 r90 top (schematic designator D1)
D3 "ESDA7P120-1U1M" ST_QFN_1610 182.045,-44.71 r90 top (schematic designator D2)
D4 "ESDA7P120-1U1M" ST_QFN_1610 168.5,10.35 r90 top (schematic designator D3)
D5 "150066M153000" LED_0606_RGB_WURTH 210,23 r90 top (schematic designator D4)
D6 "STPS120MF" SODFL375X95-2N 200.955,-33.59 r270 top (schematic designator D1)
D7 "MMSZ5226B-7-F" SOD-123 205.955,-30.29 r90 top (schematic designator D2)
ESP1 "ESP32-WROVER-E(16MB)" ESP32-WROVER 40.82,12.81 r270 top (schematic designator ESP32_MOD)
FB1 "FERRITE BEAD 1 KOHM 0402 1LN" L0402 219.5,10 r0 top
FB2 "FERRITE BEAD 470 OHM 0603 1LN" L0603 217.955,-29.44 r90 top (schematic designator FB1)
FID1 "N/A" Fiducial 7,-7 r0 top
FID2 "N/A" Fiducial 8,48 r90 top
FID3 "N/A" Fiducial 42,-9 r90 top
G1 "Logo_ESD" Logo_ESD 55.045,45.29 r0 top
Ground&PowerPlanes_1 "Number & Stacking Stripe" SIGNAL-1 97.079,-21.074 r0 top
Ground&PowerPlanes_2 "Number & Stacking Stripe" PLANE-2 97.079,-21.074 r0 top
Ground&PowerPlanes_3 "Number & Stacking Stripe" PLANE-3 97.079,-21.074 r0 top
Ground&PowerPlanes_4 "Number & Stacking Stripe" SIGNAL-4 97.079,-21.074 r0 top
Ground&PowerPlanes_5 "Number & Stacking Stripe" SIGNAL-5 97.079,-21.074 r0 top
Ground&PowerPlanes_6 "Number & Stacking Stripe" SIGNAL-6 97.079,-21.074 r0 bottom
J1 "NO Bridge" NO_SolderBridge_0603 225.955,-10.99 r90 top
L1 "FIXED IND COUIPLED 6.8UH 1.2A 160 mOHM SMD" IND_LPD5030 210.955,-30.44 r0 top
LD1 "150066M153000" LED_0606_RGB_WURTH 158,-9.5 r90 top
Logo1 "Logo ACME_CPU" LOGO_ACME_CPU 63.045,41.29 r90 top (schematic designator Logo)
MNT1 "MountHole M2. Nothing to buy or mount" MountHole_M2 1,-10 r90 top
MNT2 "MountHole M2. Nothing to buy or mount" MountHole_M2 2,48 r90 top
MNT3 "MountHole M2. Nothing to buy or mount" MountHole_M2 47,47 r90 top
MNT4 "MountHole M2. Nothing to buy or mount" MountHole_M2 49,-9 r90 top
NT1 "Net Tie" "Net Tie 6x30mil" 156.955,-22.112 r90 top net-tie
NT2 "Net Tie" "Net Tie 6x30mil" 161.955,-22.112 r90 top net-tie
NT3 "Net Tie" "Net Tie 6x30mil" 174.045,48.29 r90 top net-tie
NT4 "Net Tie" "Net Tie 6x30mil" 168.045,48.29 r90 top net-tie
NT5 "Net Tie" "Net Tie 6x30mil" 149.045,48.29 r90 top net-tie
NT6 "Net Tie" "Net Tie 6x30mil" 217.045,34.29 r90 top net-tie
NT7 "Net Tie" "Net Tie 6x30mil" 211.045,34.29 r90 top net-tie
NT8 "Net Tie" "Net Tie 6x30mil" 206.045,34.29 r90 top net-tie
NT9 "Net Tie" "Net Tie 6x30mil" 200.045,34.29 r90 top net-tie
NT10 "Net Tie" "Net Tie 6x30mil" 181,33.178 r90 top net-tie
NT11 "Net Tie" "Net Tie 1x3mm" 72,-32 r90 top net-tie
Q1 "BC847CW,115" SOT-323 164.955,-23.29 r90 top
Q2 "BC847CW,115" SOT-323 173.955,-24.29 r90 top
Q3 "BC847CW,115" SOT-323 177.955,-24.29 r90 top
R1 "RES SMD 0 OHM JUMPER 1/16W 0402" R0402 162.955,-21.112 r90 top
R2 "RES SMD 10K OHM 1% 1/16W 0402" R0402 158.955,-21.112 r90 top
R3 "RES SMD 10K OHM 1% 1/16W 0402" R0402 170.955,-24.112 r90 top
R4 "RES SMD 10K OHM 1% 1/16W 0402" R0402 161.955,-24.112 r90 top
R5 "RES SMD 100 OHM 1% 1/16W 0402" 0402R 166.955,-24.112 r90 top
R6 "RES SMD 100 OHM 1% 1/16W 0402" 0402R 152.955,-24.112 r90 top
R7 "RES SMD 2.7K OHM 1% 1/16W 0402" R0402 169.955,-21.112 r90 top
R8 "RES SMD 2.7K OHM 1% 1/16W 0402" R0402 174.955,-21.112 r90 top
R9 "RES SMD 100K OHM 1% 1/16W 0402" 0402R 182.955,-21.112 r90 top
R10 "RES SMD 100K OHM 1% 1/16W 0402" 0402R 176.955,-21.112 r90 top
R11 "RES SMD 100K OHM 1% 1/16W 0402" 0402R 171.955,-21.112 r90 top
R12 "RES SMD 100K OHM 1% 1/16W 0402" 0402R 166.955,-21.112 r90 top
R13 "RES SMD 2.7K OHM 1% 1/16W 0402" R0402 178.955,-21.112 r90 top
R14 "RES SMD 2.7K OHM 1% 1/16W 0402" R0402 184.955,-21.112 r90 top
R15 "RES SMD 100 OHM 1% 1/16W 0402" R0402 160.045,44.29 r90 top (schematic designator R1)
R16 "RES SMD 10K OHM 1% 1/16W 0402" R0402 166.045,44.29 r90 top (schematic designator R2)
R17 "RES SMD 100 OHM 1% 1/16W 0402" R0402 228.455,-13.29 r180 top (schematic designator R1)
R18 "RES SMD 100 OHM 1% 1/16W 0402" R0402 230.955,-12.79 r90 top (schematic designator R2)
R19 "RES SMD 100 OHM 1% 1/16W 0402" R0402 231.955,-12.79 r90 top (schematic designator R3)
R20 "RES SMD 100 OHM 1% 1/16W 0402" R0402 232.955,-12.79 r90 top (schematic designator R4)
R21 "RES SMD 100 OHM 1% 1/16W 0402" R0402 231.955,-10.79 r90 top (schematic designator R5)
R22 "RES SMD 47K OHM 1% 1/16W 0402" R0402 152,-0.5 r90 top (schematic designator R1)
R23 "RES SMD 23.7K OHM 1% 1/16W 0402" R0402 158,-0.5 r90 top (schematic designator R2)
R24 "RES SMD 1K OHM 1% 1/16W 0402" R0402 169,-9.5 r90 top (schematic designator R3)
R25 "RES ARRAY 8 RES 100K OHM 1606" YAG_YC248 176,-10.5 r0 top (schematic designator R4)
R26 "RES SMD 10K OHM 1% 1/16W 0402" R0402 163,-9.5 r90 top (schematic designator R5)
R27 "RES SMD 402 OHM 1% 1/16W 0402" R0402 161,-9.5 r90 top (schematic designator R6)
R28 "RES SMD 402 OHM 1% 1/16W 0402" R0402 166,-9.5 r90 top (schematic designator R7)
R29 "RES SMD 402 OHM 1% 1/16W 0402" R0402 172,-9.5 r90 top (schematic designator R8)
R30 "RES SMD 100 OHM 1% 1/16W 0402" 0402R 180.045,46.29 r90 top (schematic designator R15)
R31 "RES SMD 100 OHM 1% 1/16W 0402" 0402R 188,14.5 r90 top (schematic designator R16)
R32 "RES SMD 100 OHM 1% 1/16W 0402" 0402R 183,23.5 r90 top (schematic designator R16)
R33 "RES SMD 63.4K OHM 1% 1/16W 0402" R_0402 227.955,-26.29 r180 top (schematic designator R17)
R34 "RES SMD 910K OHM 1% 1/16W 0402" R_0402 45,-47.5 r90 top (schematic designator R1)
R35 "RES SMD 390K OHM 1% 1/16W 0402" R0402 46,-44.3 r90 top (schematic designator R2)
R36 "RES SMD 88.7K OHM 1% 1/16W 0402" 0402R 40,-47.5 r90 top (schematic designator R3)
R37 "RES SMD 2.7K OHM 1% 1/16W 0402" R0402 179,33.178 r90 top (schematic designator R18)
R38 "RES SMD 2.7K OHM 1% 1/16W 0402" R0402 185,33.178 r90 top (schematic designator R19)
R39 "RES SMD 10K OHM 1% 1/16W 0402" R0402 194.705,-3.54 r90 top (schematic designator R1)
R40 "RES SMD 10K OHM 1% 1/16W 0402" 0402R 212.455,-6.29 r180 top (schematic designator R22)
R41 "RES SMD 18.2K OHM 1% 1/16W 0402" R_0402 212.455,-4.29 r180 top (schematic designator R23)
R42 "RES SMD 11K OHM 1% 1/16W 0402" R_0402 210.455,-5.29 r0 top (schematic designator R24)
R43 "RES SMD 7.5K OHM 1% 1/10W 0603" R0603 210.805,-2.29 r180 top (schematic designator R25)
R44 "RES SMD 5.36K OHM 1% 1/16W 0402" R0402 210.455,-1.29 r180 top (schematic designator R26)
R45 "RC0402FR-072K7L" R0402 210.455,-0.29 r0 top (schematic designator R27)
R46 "RES SMD 2.7K OHM 1% 1/16W 0402" R0402 210.655,-3.785 r180 top (schematic designator R28)
R47 "RES SMD 1K OHM 1% 1/16W 0402" R0402 212.455,-5.29 r180 top (schematic designator R29)
R48 "RES SMD 5.1K OHM 1% 1/16W 0402" R0402 190,-33.9 r90 top (schematic designator R30)
R49 "RES SMD 910K OHM 1% 1/16W 0402" R_0402 44.955,-38.79 r90 top (schematic designator R1)
R50 "RES SMD 390K OHM 1% 1/16W 0402" R0402 45.955,-35.59 r90 top (schematic designator R2)
R51 "RES SMD 88.7K OHM 1% 1/16W 0402" 0402R 39.955,-38.79 r90 top (schematic designator R3)
R52 "RES SMD 402 OHM 1% 1/16W 0402" R0402 207.045,22.29 r90 top value=22k (schematic designator R31)
R53 "RES SMD 402 OHM 1% 1/16W 0402" R0402 213.045,22.29 r90 top value=22k (schematic designator R32)
R54 "RES SMD 402 OHM 1% 1/16W 0402" R0402 219.045,22.29 r90 top value=22k (schematic designator R33)
R55 "RES SMD 2.26 OHM 1% 1/10W 0603" R0603 203.955,-34.44 r90 top (schematic designator R1)
R56 "RES SMD 63.4K OHM 1% 1/16W 0402" R0402 215.955,-31.29 r180 top (schematic designator R2)
R57 "RES SMD 1K OHM 1% 1/16W 0402" R0402 -20.955,23.29 r90 top (schematic designator R1)
R58 "RES SMD 10K OHM 1% 1/16W 0402" R0402 241,0.5 r90 top (schematic designator R1)
R59 "RES SMD 10K OHM 1% 1/16W 0402" R0402 242,-11.5 r90 top (schematic designator R2)
R60 "RES SMD 10K OHM 1% 1/16W 0402" R0402 240,0.5 r90 top (schematic designator R3)
R61 "DNP*" 0402R 195,33.5 r90 top (schematic designator R20)
R62 "DNP*" 0402R 189,33.5 r90 top (schematic designator R21)
TFT1 "LH200K-IF05" CONN_0524352271 3,20 r0 top (schematic designator TFT)
TP1 "Test Point Pad" Testpoint 241.045,-58.71 r90 top
TP2 "Test Point Pad" Testpoint 235.045,-58.71 r90 top
TP3 "Test Point Pad" Testpoint 229.045,-58.71 r90 top
TP4 "Test Point Pad" Testpoint 223.045,-58.71 r90 top
TP5 "Test Point Pad" Testpoint 191.045,-58.71 r90 top
TP6 "Test Point Pad" Testpoint 178.045,-58.71 r90 top
TP7 "Test Point Pad" Testpoint 165.045,-58.71 r90 top
TP8 "Test Point Pad" Testpoint 152.045,-58.71 r90 top
TP9 "Test Point Pad" Testpoint 218.045,-58.71 r90 top
TP10 "Test Point Pad" Testpoint 210.045,-58.71 r90 top
TP11 "Test Point Pad" Testpoint 204.045,-58.71 r90 top
TP12 "Test Point Pad" Testpoint 197.045,-58.71 r90 top
TP13 "Test Point Pad" Testpoint 184.045,-58.71 r90 top
TP14 "Test Point Pad" Testpoint 171.045,-58.71 r90 top
TP15 "Test Point Pad" Testpoint 158.045,-58.71 r90 top
U1 "IC SIT1533AI-H4-DCC-32.768E MEMS OSC XO 32.7680KHZ LVCMOS" XTAL4_SiT1533_SIT 184.045,-24.71 r90 top
U2 "TXS0102DQMR" DQM8 155.4,21.55 r90 top (schematic designator U1)
U3 "CP2102N-A02-GQFN28R" QFN28_5X5 167,-2.5 r0 top (schematic designator U1)
U4 "PCAL9539AHF,128" "QFN-EP 24" 209,-19 r90 top (schematic designator U1)
U5 "IM69D130V01XTSA1" MIC_IM69D130V01XTSA1 194,13.5 r0 top (schematic designator U2)
U6 "IM69D130V01XTSA1" MIC_IM69D130V01XTSA1 185,22.5 r0 top (schematic designator U2)
U7 "CMX655DQ6" QFN50P400X400X100_HS-25N 228.955,-22.29 r90 top (schematic designator U3)
U8 "TPSM82822SILR" SIL0010D 43,-45 r180 top (schematic designator U1)
U9 "MAX30102EFD+T" XDCR_MAX30101EFD+ 203.955,12.21 r0 top (schematic designator U4)
U10 "LDLN025J18R" Flip-Chip4 158.13,-38.115 r90 top (schematic designator U1)
U11 "TXS0102DQMR" DQM8 154.4,31.55 r90 top (schematic designator U1)
U12 "TPS22930AYZVT" YZV4_TEX 197.705,-3.54 r90 top (schematic designator U1)
U13 "BMA253" LGA12C50P4X4_200X200X100 227.955,8.21 r90 top (schematic designator U1)
U14 "BMP388" QFN_BMP388_BOS 221,8.5 r90 top (schematic designator U1)
U15 "ECMF02-2AMX6" QFN-6L 152.5,9.35 r90 top (schematic designator U5)
U16 "D3V3F8U9LP3810-7" U-DFN3810-9 215.46,-4.29 r180 top (schematic designator U6)
U17 "BQ25157YFPR" YFP0020 187,-33.9 r0 top (schematic designator U7)
U18 "TPSM82822SILR" SIL0010D 42.955,-36.29 r180 top (schematic designator U1)
U19 "TPS61169DCKR" DCK0005A_L 215.955,-34.44 r90 top (schematic designator U1)
U20 "PCA9632TK,118" SOT908-1 202,22.5 r90 top (schematic designator U1)
U21 "MT29F1G01ABAFDWB-IT:F TR" U-PDFN-8_8X6_P127 241,-5.5 r90 top (schematic designator U1)
X1 "JTAG" TC2050-IDC-NL 228.59,-4.29 r0 top
X2 "BATT" CONN_S3B-ZR_JST 188.045,-43.71 r0 top (schematic designator X1)
X3 "10118194-0001LF" 10118194-0001LF 161.5,10.35 r0 top (schematic designator X2)
X4 "CONN 5034801000 FFC FPC 10POS 0.50MM R/A" MOLEX_5034801000 218.955,-3.29 r90 top (schematic designator X3)
Y1 "CMS-151135-078S" SPKR_CMS-151135-078S 241,-24 r0 top

## Footprints (in the part's own frame and the unit in brackets; to place one, negate y for a bottom-side part, rotate by r counter-clockwise, add the part's x,y. Pads: shape width x height; smd on the part's side, far side on the other; paste and mask are expansions set on the pad)
0402R [mm]
  rrect35% 0.5x0.55 smd: 1(-0.5,0) 2(0.5,0)
  silkscreen extent -1,-0.51 1,0.5, body extent -0.53,-0.25 0.53,0.25, height 0.71
0603C [mm]
  rrect35% 0.8x0.991 smd: 1(-0.85,0) 2(0.85,0)
  silkscreen extent -1.52,-0.75 1.52,0.75, body extent -0.87,-0.48 0.87,0.48, height 0.87
10118194-0001LF [mm] "USB - micro B USB 2.0 Receptacle Connector 5 Position Surface Mount, Right Angle; Through Hole"
  rect 0.4x1.35 smd: 1(-1.3,4.15) 2(-0.65,4.15) 3(0,4.15) 4(0.65,4.15) 5(1.3,4.15)
  rrect100% 0.9x1.55 hole 0.5 slot 1.15 at 90 deg: 6(-3.5,1.45) 6(3.5,1.45)
  rect 1.2x1.55 smd: 6(-2.9,1.45) 6(2.9,1.45)
  rrect100% 1.25x0.95 hole 0.55 slot 0.85 at 0 deg: 6(-2.5,4.15) 6(2.5,4.15)
  rect 1.5x1.55 smd: 6(-1,1.45) 6(1,1.45)
  silkscreen extent -4.2,0.2 4.2,4.9, body extent -4.02,-1.25 4.02,4.33, height 2.77
C0402 [mm]
  rrect35% 0.5x0.55 smd: 1(-0.5,0) 2(0.5,0)
  silkscreen extent -1,-0.5 1,0.5, body extent -0.52,-0.28 0.52,0.28, height 0.55
C0603 [mm]
  rrect35% 0.8x0.991 smd: 1(-0.85,0) 2(0.85,0)
  silkscreen extent -1.52,-0.75 1.52,0.75, body extent -0.87,-0.48 0.87,0.48, height 0.87
C0805 [mm]
  rrect15% 1.15x1.45 smd: 1(-0.9,0) 2(0.9,0)
  silkscreen extent -1.78,-0.94 1.77,0.94, body extent -1.1,-0.73 1.1,0.72, height 0.88
CAP_0402 [mm]
  rect 0.4x0.5 smd: 1(-0.5,0) 2(0.5,0)
  silkscreen extent 0,-0.2 0,0.2, body extent -0.5,-0.25 0.5,0.25, height 0.5
CAP_0603 [mm]
  rect 0.6x0.8 smd: 1(-0.7,0) 2(0.7,0)
  silkscreen extent 0,-0.4 0,0.4, body extent -0.75,-0.41 0.75,0.41, height 0.82
CAPC1608X08N_0603 [mm] "Chip Capacitor, 2-Leads, Body 1.60x0.80mm, IPC Medium Density"
  rect 0.7x0.8 smd: 1(-0.7,0) 2(0.7,0)
  silkscreen extent 0,-0.38 0,0.38, body extent -0.87,-0.47 0.88,0.48, height 0.9
CONN_0524352271 [mm] "TFT LCD MODULE"
  rect 0.8x0.3 smd mask+0.05: 1(3.1,-5.25) 2(3.1,-4.75) 3(3.1,-4.25) 4(3.1,-3.75) 5(3.1,-3.25) 6(3.1,-2.75) 7(3.1,-2.25) 8(3.1,-1.75) 9(3.1,-1.25) 10(3.1,-0.75) 11(3.1,-0.25) 12(3.1,0.25) 13(3.1,0.75) 14(3.1,1.25) 15(3.1,1.75) 16(3.1,2.25) 17(3.1,2.75) 18(3.1,3.25) 19(3.1,3.75) 20(3.1,4.25) 21(3.1,4.75) 22(3.1,5.25)
  rect 0.2x0.2 smd mask+0.05: 23(1.1,7.55) 24(1.1,-7.55)
  1-SIG-TOP region: 2.7,6.5 2.7,8.9 0.5,8.9 0.5,7.8 -0.35,7.8 -0.35,6.5
  1-SIG-TOP region: 2.7,-6.5 2.7,-8.9 0.5,-8.9 0.5,-7.8 -0.35,-7.8 -0.35,-6.5
  1-SIG-TOP pour cut-out: -0.55,6.3 -0.55,8 0.3,8 0.3,9.1 2.9,9.1 2.9,6.3 2.2,6.3 2.2,5.7 0.8,5.7 0.8,6.3
  1-SIG-TOP pour cut-out: -0.55,-6.3 -0.55,-8 0.3,-8 0.3,-9.1 2.9,-9.1 2.9,-6.3 2.2,-6.3 2.2,-5.7 0.8,-5.7 0.8,-6.3
  1-SIG-TOP keep-out region: 0.8,5.7 2.2,5.7 2.2,6.5 0.8,6.5
  1-SIG-TOP keep-out region: 0.8,-6.5 2.2,-6.5 2.2,-5.7 0.8,-5.7
  silkscreen extent -2.3,-8.5 4.1,8.5, body extent -2,-17.3 47.3,17.3, height 2.1
CONN_S3B-ZR_JST [mm] "Connector Header Through Hole, Right Angle 3 position 0.059\" (1.50mm)"
  round 1.1 hole 0.7: 1(-1.5,2.1) 2(0,2.1) 3(1.5,2.1)
  silkscreen extent -3.12,-2.29 3.1,4.2, body extent -3,-2.49 3,3.51, height 3.8
DCK0005A_L [mm]
  rect 0.9x0.4 smd paste-0.025 mask+0.05: 1(-1.1,0.65) 2(-1.1,0) 3(-1.1,-0.65) 4(1.1,-0.65) 5(1.1,0.65)
  silkscreen extent -0.7,-1.2 0.7,1.2, body extent -1.05,-1 1.05,1, height 1
DQM8 [mm]
  rect 0.7x0.2 smd mask+0.05: 1(-0.45,0.6) 2(-0.45,0.2) 3(-0.45,-0.2) 4(-0.45,-0.6) 5(0.45,-0.6) 6(0.45,-0.2) 7(0.45,0.2) 8(0.45,0.6)
  silkscreen extent -1.05,0.95 -0.95,1.05, body extent -0.6,-0.9 0.6,0.9, height 0.5
ESP32-WROVER [mm]
  rrect50% 1.45x0.93 smd: 1(-8.81,8.26) 2(-8.81,6.99) 3(-8.81,5.72) 4(-8.81,4.45) 5(-8.81,3.18) 6(-8.81,1.91) 7(-8.81,0.64) 8(-8.81,-0.63) 9(-8.81,-1.9) 10(-8.81,-3.17) 11(-8.81,-4.44) 12(-8.81,-5.71) 13(-8.81,-6.98) 14(-8.81,-8.25) 15(-8.81,-9.52) 16(-8.81,-10.79) 17(-8.81,-12.06) 18(-8.81,-13.33) 19(-8.81,-14.6) 20(8.81,-14.6) 21(8.81,-13.33) 22(8.81,-12.06) 23(8.81,-10.79) 24(8.81,-9.52) 25(8.81,-8.25) 26(8.81,-6.98) 27(8.81,-5.71) 28(8.81,-4.44) 29(8.81,-3.17) 30(8.81,-1.9) 31(8.81,-0.63) 32(8.81,0.64) 33(8.81,1.91) 34(8.81,3.18) 35(8.81,4.45) 36(8.81,5.72) 37(8.81,6.99) 38(8.81,8.26)
  rect 4x4 smd paste-3: 39(-1.38,0.47)
  Keep-Out Layer region: 9,9.324 -9.023,9.324 -9.023,15.7 9,15.7
  Keep-Out Layer region: 9,9.331 -9.03,9.331 -9.03,15.7 9,15.7
  Keep-Out Layer region: 9,9.33 -9.029,9.33 -9.029,15.7 9,15.7
  silkscreen extent -10.22,-15.7 9,15.7, body extent -9,-15.7 9,15.7, height 3.65
Fiducial [mm]
  round 1.5 smd paste+0 mask+0.75: ""(0,0)
  round 1.5 smd far side paste+0 mask+0.75: ""(0,0)
  1-SIG-TOP pour cut-out: 0,1.6 0.158,1.6 0.467,1.538 0.758,1.418 1.02,1.243 1.243,1.02 1.418,0.758 1.538,0.467 1.6,0.158 1.6,0 1.6,0 1.6,-0.158 1.538,-0.467 1.418,-0.758 1.243,-1.02 1.02,-1.243 0.758,-1.418 0.467,-1.539 0.158,-1.6 0,-1.6 -0.158,-1.6 -0.467,-1.538 -0.758,-1.418 -1.02,-1.243 -1.243,-1.02 -1.418,-0.758 -1.538,-0.467 -1.6,-0.158 -1.6,0 -1.6,0.158 -1.538,0.467 -1.418,0.758 -1.243,1.02 -1.02,1.243 -0.758,1.418 -0.467,1.538 -0.158,1.6 0,1.6
  6-GND-BOT pour cut-out: 0,1.6 0.158,1.6 0.467,1.538 0.758,1.418 1.02,1.243 1.243,1.02 1.418,0.758 1.538,0.467 1.6,0.158 1.6,0 1.6,-0.158 1.538,-0.467 1.418,-0.758 1.243,-1.02 1.02,-1.243 0.758,-1.418 0.467,-1.539 0.158,-1.6 0,-1.6 -0.158,-1.6 -0.467,-1.538 -0.758,-1.418 -1.02,-1.243 -1.243,-1.02 -1.418,-0.758 -1.538,-0.467 -1.6,-0.158 -1.6,0 -1.6,0.158 -1.538,0.467 -1.418,0.758 -1.243,1.02 -1.02,1.243 -0.758,1.418 -0.467,1.538 -0.158,1.6 0,1.6
  body extent -1.49,-1.5 1.5,1.5
Flip-Chip4 [mm] "Flip-Chip4, 4-Leads, Body 0.63x0.63mmx0.45mm, Pitch 0.35mm"
  round 0.2 smd mask+0: A1(-0.175,0.175) A2(0.175,0.175) B1(-0.175,-0.175) B2(0.175,-0.175)
  silkscreen extent -0.5,0.41 -0.41,0.5, body extent -0.32,-0.32 0.32,0.32, height 0.45
IND_LPD5030 [mm] "Shielded Coupled Inductors"
  rect 0.75x0.75 smd: 1(-2.125,1.125) 1(-1.125,2.125) 2(-2.125,-1.125) 2(-1.125,-2.125) 3(1.125,-2.125) 3(2.125,-1.125) 4(1.125,2.125) 4(2.125,1.125)
  1-SIG-TOP region: -0.75,-1.75 -0.75,-2.5 -1.7,-2.5 -2.5,-1.7 -2.5,-0.75 -1.75,-0.75 -1.75,-1.151 -1.151,-1.75
  1-SIG-TOP region: 1.75,-0.75 2.5,-0.75 2.5,-1.7 1.7,-2.5 0.75,-2.5 0.75,-1.75 1.151,-1.75 1.75,-1.151
  1-SIG-TOP region: 0.75,1.75 0.75,2.5 1.7,2.5 2.5,1.7 2.5,0.75 1.75,0.75 1.75,1.151 1.151,1.75
  1-SIG-TOP region: -1.75,0.75 -2.5,0.75 -2.5,1.7 -1.7,2.5 -0.75,2.5 -0.75,1.75 -1.151,1.75 -1.75,1.151
  silkscreen extent -2.8,-2.8 2.8,2.8, body extent -2.44,-2.44 2.44,2.44, height 2.98
L0402 [mm]
  rrect35% 0.5x0.55 smd: 1(-0.5,0) 2(0.5,0)
  silkscreen extent -1,-0.51 1,0.5, body extent -0.53,-0.25 0.53,0.25, height 0.71
L0603 [mm]
  rrect35% 0.8x1 smd: 1(-0.85,0) 2(0.85,0)
  silkscreen extent -1.5,-0.75 1.5,0.75, body extent -0.8,-0.4 0.8,0.4, height 0.8
LED_0606_RGB_WURTH [mm] "Chip; Body 1.6 x 1.6 mm (LxW typ) WURTH"
  rect 0.8x0.5 smd: A(-0.8,0.45) BK(-0.8,-0.45) GK(0.8,-0.45) RK(0.8,0.45)
  body extent -0.8,-0.8 0.8,0.8, height 0.4
LGA12C50P4X4_200X200X100 [mm] "LGA, 12-Leads, Body 2.00x2.00mmx1.00mm, Pitch 0.50mm"
  rect 0.41x0.28 smd mask+0.05: 1(-0.815,0.75) 2(-0.815,0.25) 3(-0.815,-0.25) 4(-0.815,-0.75) 7(0.815,-0.75) 8(0.815,-0.25) 9(0.815,0.25) 10(0.815,0.75)
  rect 0.28x0.41 smd mask+0.05: 5(-0.25,-0.815) 6(0.25,-0.815) 11(0.25,0.815) 12(-0.25,0.815)
  1-SIG-TOP keep-out region: -0.457,-0.457 0.457,-0.457 0.457,0.457 -0.457,0.457
  body extent -1.04,-1.04 1.04,1.04, height 1
LOGO_ACME_CPU [mm]
Logo_ESD [mm] "Silk only"
  silkscreen extent -3.34,-2.24 3.61,3.67
MIC_IM69D130V01XTSA1 [mm]
  rect 0.75x0.45 smd paste-1: 1(0.85,1.5) 2(0.85,0.8) 3(-0.85,1.5) 4(-0.85,0.8)
  rect 0.1x0.1 smd paste-1 mask+0: 5(0,0.12)
  round 0.8 hole 0.8 unplated: ""(0,-0.68)
  1-SIG-TOP region: 248 vertices and 0 holes, not listed, extent -1.03,-1.71 1.03,0.35
  silkscreen extent -1.54,-2 2,2.04, body extent -1.5,-2 1.5,2, height 1.3
MOLEX_5034801000 [mm]
  rect 0.3x0.7 smd mask+0.05: 1(-2.25,1.5) 2(-1.75,1.5) 3(-1.25,1.5) 4(-0.75,1.5) 5(-0.25,1.5) 6(0.25,1.5) 7(0.75,1.5) 8(1.25,1.5) 9(1.75,1.5) 10(2.25,1.5)
  rect 0.3x1 smd mask+0.05: S1(-3.04,-1.15) S2(3.04,-1.15)
  silkscreen extent -3.35,-1.8 3.35,2.33, body extent -3.35,-1.8 3.35,1.8, height 1.85
MountHole_M2 [mm] "Mount Hole M2"
  round 4 hole 2.2 paste-2 mask-2: 1(0,0)
  body extent -2,-2 2,2
"Net Tie 1x3mm" [mm]
  rect 1.5x1 smd paste-1 mask-1: 1(-0.75,0) 2(0.75,0)
  1-SIG-TOP region: -0.05,-0.5 0.05,-0.5 0.05,0.5 -0.05,0.5
"Net Tie 6x30mil" [mil]
  rect 16x6 smd paste-5 mask-5: 1(-7,0) 2(7,0)
NO_SolderBridge_0603 [mil]
  rect 26x35 smd: 1(-27.56,0) 2(27.56,0)
  1-SIG-TOP keep-out region: -8,-17.72 8,-17.72 8,17.72 -8,17.72
  silkscreen extent -5,-20 5,20
PLANE-2 [mm]
  2-GND region: 4.75,-0.125 4.75,0 2.125,0 2.125,-0.125
  2-GND region: 2.125,-0.125 2.25,-0.125 2.25,2.5 2.125,2.5
  2-GND region: 2.375,0.552 2.375,0.125 4.5,0.125 4.5,0.552
  2-GND region: 4.5,2.25 3.923,2.25 3.923,0.125 4.5,0.125
  2-GND region: 4.5,1.83 4.5,2.25 2.375,2.25 2.375,1.83
  2-GND region: 2.375,0.125 3.103,0.125 3.103,2.25 2.375,2.25
  2-GND region: 4.75,2.375 4.75,2.5 2.125,2.5 2.125,2.375
  2-GND region: 4.625,-0.125 13.75,-0.125 13.75,2.5 4.625,2.5
  2-GND region: 4.75,-0.125 4.75,0 2.125,0 2.125,-0.125
  2-GND region: 2.375,0.552 2.375,0.125 4.5,0.125 4.5,0.552
  2-GND region: 4.5,2.25 3.923,2.25 3.923,0.125 4.5,0.125
  2-GND region: 4.5,1.83 4.5,2.25 2.375,2.25 2.375,1.83
  2-GND region: 2.375,0.125 3.103,0.125 3.103,2.25 2.375,2.25
  2-GND region: -0.125,-0.125 2.25,-0.125 2.25,2.5 -0.125,2.5
PLANE-3 [mm]
  3-PWR region: 4.375,-0.125 4.5,-0.125 4.5,2.5 4.375,2.5
  3-PWR region: 2.125,-0.125 2.25,-0.125 2.25,2.5 2.125,2.5
  3-PWR region: 7,2.375 7,2.5 4.375,2.5 4.375,2.375
  3-PWR region: 4.625,0.125 5.356,0.125 5.356,2.25 4.625,2.25
  3-PWR region: 6.75,1.83 6.75,2.25 4.625,2.25 4.625,1.83
  3-PWR region: 6.75,2.25 6.189,2.25 6.189,0.125 6.75,0.125
  3-PWR region: 4.625,0.552 4.625,0.125 6.75,0.125 6.75,0.552
  3-PWR region: 7,-0.125 7,0 4.375,0 4.375,-0.125
  3-PWR region: -0.125,-0.125 4.399,-0.125 4.399,2.5 -0.125,2.5
  3-PWR region: 7,2.375 7,2.5 4.375,2.5 4.375,2.375
  3-PWR region: 4.625,0.125 5.356,0.125 5.356,2.25 4.625,2.25
  3-PWR region: 6.75,1.83 6.75,2.25 4.625,2.25 4.625,1.83
  3-PWR region: 6.75,2.25 6.189,2.25 6.189,0.125 6.75,0.125
  3-PWR region: 4.625,0.552 4.625,0.125 6.75,0.125 6.75,0.552
  3-PWR region: 7,-0.125 7,0 4.375,0 4.375,-0.125
  3-PWR region: 6.875,-0.125 13.75,-0.125 13.75,2.5 6.875,2.5
QFN28_5X5 [mm]
  rrect100% 0.9x0.3 smd paste+0 mask+0.05: 1(-2.324,1.5) 2(-2.324,1) 3(-2.324,0.5) 4(-2.324,0) 5(-2.324,-0.5) 6(-2.324,-1) 7(-2.324,-1.5) 15(2.324,-1.5) 16(2.324,-1) 17(2.324,-0.5) 18(2.324,0) 19(2.324,0.5) 20(2.324,1) 21(2.324,1.5)
  rrect100% 0.3x0.9 smd paste+0 mask+0.05: 8(-1.5,-2.324) 9(-1,-2.324) 10(-0.5,-2.324) 11(0,-2.324) 12(0.5,-2.324) 13(1,-2.324) 14(1.5,-2.324) 22(1.5,2.324) 23(1,2.324) 24(0.5,2.324) 25(0,2.324) 26(-0.5,2.324) 27(-1,2.324) 28(-1.5,2.324)
  rect 2x2 smd paste-2 mask+0.05: 29(0,0)
  1-SIG-TOP region: -1.675,-1.675 1.675,-1.675 1.675,1.675 -1.675,1.675
  silkscreen extent -2.63,-2.63 2.63,2.63, body extent -2.55,-2.55 2.55,2.55, height 0.94
QFN50P400X400X100_HS-25N [mm] "QFN, 24-Leads, Body 4.00x4.00mm, Pitch 0.50mm, Thermal Pad 2.68x2.68mm, IPC Medium Density"
  oval 0.8x0.25 smd: 1(-1.925,1.25) 2(-1.925,0.75) 3(-1.925,0.25) 4(-1.925,-0.25) 5(-1.925,-0.75) 6(-1.925,-1.25) 13(1.925,-1.25) 14(1.925,-0.75) 15(1.925,-0.25) 16(1.925,0.25) 17(1.925,0.75) 18(1.925,1.25)
  oval 0.25x0.8 smd: 7(-1.25,-1.925) 8(-0.75,-1.925) 9(-0.25,-1.925) 10(0.25,-1.925) 11(0.75,-1.925) 12(1.25,-1.925) 19(1.25,1.925) 20(0.75,1.925) 21(0.25,1.925) 22(-0.25,1.925) 23(-0.75,1.925) 24(-1.25,1.925)
  rect 2.68x2.68 smd: 25(0,0)
  silkscreen extent -2.92,-2.15 2.15,2.15, body extent -2.05,-2.05 2.05,2.05, height 1
QFN-6L [mm]
  rect 0.6x0.25 smd: 1(-0.65,0.5) 2(-0.65,0) 3(-0.65,-0.5) 4(0.65,-0.5) 5(0.65,0) 6(0.65,0.5)
  silkscreen extent -1.37,-1.03 0.92,1.07, body extent -0.77,-0.87 0.77,0.87, height 0.55
"QFN-EP 24" [mm]
  rect 0.6x0.24 smd: 1(-1.9,1.25) 2(-1.9,0.75) 3(-1.9,0.25) 4(-1.9,-0.25) 5(-1.9,-0.75) 6(-1.9,-1.25) 13(1.9,-1.25) 14(1.9,-0.75) 15(1.9,-0.25) 16(1.9,0.25) 17(1.9,0.75) 18(1.9,1.25)
  rect 0.24x0.6 smd: 7(-1.25,-1.9) 8(-0.75,-1.9) 9(-0.25,-1.9) 10(0.25,-1.9) 11(0.75,-1.9) 12(1.25,-1.9) 19(1.25,1.9) 20(0.75,1.9) 21(0.25,1.9) 22(-0.25,1.9) 23(-0.75,1.9) 24(-1.25,1.9)
  rect 1x1 smd paste-10: EP(0,0)
  1-SIG-TOP region: -1.225,-1.225 1.225,-1.225 1.225,1.225 -1.225,1.225
  silkscreen extent -2.59,-2.2 2.2,2.2, body extent -2.07,-2.07 2.08,2.07, height 0.8
QFN_BMP388_BOS [mm]
  rect 0.275x0.25 smd paste+0 mask+0.05: 1(-0.762,0.25) 2(-0.762,-0.25) 6(0.762,-0.25) 7(0.762,0.25)
  rect 0.25x0.275 smd paste+0 mask+0.05: 3(-0.5,-0.762) 4(0,-0.762) 5(0.5,-0.762) 8(0.5,0.762) 9(0,0.762) 10(-0.5,0.762)
  silkscreen extent -1.5,-1.1 1.1,1.1, body extent -1,-1 1,1, height 0.8
R0402 [mm]
  rrect35% 0.5x0.55 smd: 1(-0.5,0) 2(0.5,0)
  silkscreen extent -1,-0.51 1,0.5, body extent -0.53,-0.25 0.53,0.25, height 0.71
R0603 [mm]
  rrect35% 0.8x0.991 smd: 1(-0.85,0) 2(0.85,0)
  silkscreen extent -1.5,-0.75 1.5,0.75, body extent -0.8,-0.41 0.8,0.41, height 0.71
R_0402 [mm]
  rect 0.4x0.5 smd: 1(-0.5,0) 2(0.5,0)
  silkscreen extent 0,-0.2 0,0.2, body extent -0.5,-0.25 0.5,0.25, height 0.4
SIGNAL-1 [mm]
  1-SIG-TOP region: 0,0 0.125,0 0.125,2.375 0,2.375
  1-SIG-TOP region: 2.375,2.25 2.375,2.375 0,2.375 0,2.25
  1-SIG-TOP region: 2.375,2.375 2.25,2.375 2.25,0 2.375,0
  1-SIG-TOP region: 0,0.125 0,-0.889 2.375,-0.889 2.375,0.125
  1-SIG-TOP region: 2.25,0 2.375,0 2.375,2.375 2.25,2.375
  1-SIG-TOP pour cut-out: -0.125,2.5 -0.125,-0.125 13.75,-0.125 13.75,2.5
SIGNAL-4 [mm]
  4-SIG-HOR region: 6.875,2.375 6.75,2.375 6.75,0 6.875,0
  4-SIG-HOR region: 0,0.125 0,-0.889 9.125,-0.889 9.125,0.125
  4-SIG-HOR region: 9.125,2.375 9,2.375 9,0 9.125,0
  4-SIG-HOR region: 9.125,2.25 9.125,2.375 6.75,2.375 6.75,2.25
  4-SIG-HOR region: 9,0 9.125,0 9.125,2.375 9,2.375
  4-SIG-HOR pour cut-out: -0.125,2.5 -0.125,-0.125 13.75,-0.125 13.75,2.5
SIGNAL-5 [mm]
  5-SIG-VERT region: 11.25,0 11.375,0 11.375,2.375 11.25,2.375
  5-SIG-VERT region: 11.375,2.25 11.375,2.375 9,2.375 9,2.25
  5-SIG-VERT region: 11.375,2.375 11.25,2.375 11.25,0 11.375,0
  5-SIG-VERT region: 0,0.125 0,-0.889 11.375,-0.889 11.375,0.125
  5-SIG-VERT region: 9.125,2.375 9,2.375 9,0 9.125,0
  5-SIG-VERT pour cut-out: -0.125,2.5 -0.125,-0.125 13.75,-0.125 13.75,2.5
SIGNAL-6 [mm]
  1-SIG-TOP region: 0,-0.125 0,0.889 13.625,0.889 13.625,-0.125
  1-SIG-TOP region: 13.625,-2.375 13.5,-2.375 13.5,0 13.625,0
  1-SIG-TOP region: 13.625,-2.25 13.625,-2.375 11.25,-2.375 11.25,-2.25
  1-SIG-TOP region: 11.25,0 11.375,0 11.375,-2.375 11.25,-2.375
  1-SIG-TOP region: 13.5,0 13.625,0 13.625,-2.375 13.5,-2.375
  1-SIG-TOP pour cut-out: -0.125,-2.5 -0.125,0.125 13.75,0.125 13.75,-2.5
SIL0010D [mm] "uSIP, 10-Leads, Body 2.50x2.00mm, Pitch 0.50mm, IPC Medium Density"
  rrect20% 0.65x0.25 smd mask+0.05: 1(-0.625,1) 2(-0.625,0.5) 3(-0.625,0) 4(-0.625,-0.5) 5(-0.625,-1) 6(0.625,-1) 7(0.625,-0.5) 8(0.625,0) 9(0.625,0.5) 10(0.625,1)
  silkscreen extent -1.48,-1.48 1.05,1.53, body extent -1.05,-1.3 1.05,1.3, height 1.1
SOD-123 [mm]
  rect 0.9x0.95 smd: 1(-1.6,0) 2(1.6,0)
  silkscreen extent -1.87,0.7 -1.77,0.8, body extent -1.82,-0.77 1.83,0.78, height 1.15
SODFL375X95-2N [mm] "SODFL, 2-Leads, Body 1.90x3.75mm, IPC Medium Density"
  rect 0.7x0.95 smd: 1(-1.75,0)
  rect 2x1.95 smd: 1(-0.432,0)
  rect 0.95x0.65 smd: 2(1.7,0)
  silkscreen extent -2,0.92 -1.81,1.12, body extent -1.88,-1.02 1.88,1.02, height 0.95
SOT363_SOP65P210X265-6N [mm] "SOP, 6-Leads, Body 2.00x1.25mm, Pitch 0.65mm, IPC Medium Density"
  rrect30% 0.66x0.3 smd mask+0.05: 1(-0.92,0.65) 2(-0.92,0) 3(-0.92,-0.65) 4(0.92,-0.65) 5(0.92,0) 6(0.92,0.65)
  silkscreen extent -1.1,-1.1 0.2,1.35, body extent -1.1,-1.1 1.1,1.1, height 1.1
SOT908-1 [mm]
  rrect100% 0.8x0.25 smd mask+0.05: 1(-1.5,0.75) 2(-1.5,0.25) 3(-1.5,-0.25) 4(-1.5,-0.75) 5(1.5,-0.75) 6(1.5,-0.25) 7(1.5,0.25) 8(1.5,0.75)
  rect 0.5x0.5 smd mask+0.05: 9(0,0)
  1-SIG-TOP region: -0.825,-1.05 0.825,-1.05 0.825,1.05 -0.825,1.05
  silkscreen extent -2.1,-1.68 1.68,1.73, body extent -1.55,-1.55 1.55,1.55, height 1
SOT-323 [mm]
  rect 0.8x0.6 smd: 1(-0.9,0.65) 2(-0.9,-0.65) 3(0.9,0)
  body extent -1.05,-1.07 1.05,1.08, height 1.05
SPKR_CMS-151135-078S [mm]
  rect 1x1 smd paste-1 mask+0: M(-5,-6.99) P(5,-6.99)
  1-SIG-TOP region: 5.9,-7.7 3.9,-7.7 3.9,-6.14 4.74,-5.3 5.9,-5.3
  1-SIG-TOP region: -3.9,-6.14 -3.9,-7.7 -5.9,-7.7 -5.9,-5.3 -4.74,-5.3
  1-SIG-TOP lines w0: -5.9,-7.7 -3.9,-7.7 -3.9,-6.14 -4.74,-5.3 -5.9,-5.3 -5.9,-7.7
  silkscreen extent -5.5,-7.5 5.5,7.5, body extent -5.5,-7.49 5.5,7.51, height 4.5
ST_QFN_1610 [mm] "2-UDFN"
  rect 0.55x0.8 smd: 1(-0.65,0) 2(0.65,0)
  silkscreen extent -0.95,0.75 -0.85,0.85, body extent -0.85,-0.55 0.85,0.55, height 0.6
TC2050-IDC-NL [mil] "Tag-Connect 10-Pin with No Legs (PN# TC2050-IDC-NL)"
  round 39 hole 39 unplated: 0(-40,-150) 0(0,150) 0(40,-150)
  round 31 smd paste-16: 1(-25,100) 2(-25,50) 3(-25,0) 4(-25,-50) 5(-25,-100) 6(25,-100) 7(25,-50) 8(25,0) 9(25,50) 10(25,100)
  1-SIG-TOP pour cut-out: -25,100 25,100 25,-100 -25,-100
  1-SIG-TOP keep-out region: -16,100 -16,-100 16,-100 16,100
  silkscreen extent -50,-118 50,128
Testpoint [mm] "Test Point"
  round 1 smd paste-0.508 mask-0.025: 1(0,0)
  body extent -0.5,-0.5 0.5,0.5
U-DFN3810-9 [mm] "5V (Typ) Clamp 5A (8/20µs) Ipp Tvs Diode Surface Mount U-DFN3810-9"
  rect 0.5x0.3 smd paste-0.025 mask+0.05: 1(-0.495,1.7) 2(-0.495,0.8) 3(-0.495,0) 4(-0.495,-0.8) 5(-0.495,-1.7) 6(0.495,-1.3) 7(0.495,-0.4) 8(0.495,0.4) 9(0.495,1.3)
  silkscreen extent -1.4,-2.06 0.58,2.06, body extent -0.5,-1.9 0.5,1.9, height 0.55
U-PDFN-8_8X6_P127 [mm] "8-pin U-PDFN (MLP8) 8mm x 6mm x 0.65mm – Package Code: WB"
  rect 0.85x0.4 smd mask+0.05: 1(-3.92,1.905) 2(-3.92,0.635) 3(-3.92,-0.635) 4(-3.92,-1.905) 5(3.92,-1.905) 6(3.92,-0.635) 7(3.92,0.635) 8(3.92,1.905)
  silkscreen extent -4.7,-3.1 4.1,3.1, body extent -4,-3 4,3.01, height 0.8
XDCR_MAX30101EFD+ [mm]
  rect 0.75x0.35 smd: 1(-1.2,2.4) 2(-1.2,1.6) 3(-1.2,0.8) 4(-1.2,0) 5(-1.2,-0.8) 6(-1.2,-1.6) 7(-1.2,-2.4) 8(1.2,-2.4) 9(1.2,-1.6) 10(1.2,-0.8) 11(1.2,0) 12(1.2,0.8) 13(1.2,1.6) 14(1.2,2.4)
  silkscreen extent -2.25,-2.85 0.51,2.85, body extent -1.57,-2.79 1.58,2.79, height 1.65
XTAL4_SiT1533_SIT [mm]
  rect 0.4x1.4 smd paste+0 mask+0.05: 1(-0.8,0) 3(0.8,0)
  rect 0.3x0.5 smd paste+0 mask+0.05: 2(-0.099,-0.45) 4(0.106,0.45)
  silkscreen extent -1.5,-0.6 -1.3,-0.4, body extent -1,-0.6 1,0.6, height 0.55
YAG_YC248 [mm]
  rect 1.016x0.3 smd: 1(-0.826,1.75) 2(-0.826,1.25) 3(-0.826,0.75) 4(-0.826,0.25) 5(-0.826,-0.25) 6(-0.826,-0.75) 7(-0.826,-1.25) 8(-0.826,-1.75) 9(0.826,-1.75) 10(0.826,-1.25) 11(0.826,-0.75) 12(0.826,-0.25) 13(0.826,0.25) 14(0.826,0.75) 15(0.826,1.25) 16(0.826,1.75)
  silkscreen extent -0.16,-2.22 0.16,2.22, body extent -0.8,-2.1 0.8,2.1, height 0.56
YFP0020 [mm] "DSBGA - 0.5 mm max height"
  round 0.25 smd mask+0: A1(-0.6,0.8) A2(-0.2,0.8) A3(0.2,0.8) A4(0.6,0.8) B1(-0.6,0.4) B2(-0.2,0.4) B3(0.2,0.4) B4(0.6,0.4) C1(-0.6,0) C2(-0.2,0) C3(0.2,0) C4(0.6,0) D1(-0.6,-0.4) D2(-0.2,-0.4) D3(0.2,-0.4) D4(0.6,-0.4) E1(-0.6,-0.8) E2(-0.2,-0.8) E3(0.2,-0.8) E4(0.6,-0.8)
  silkscreen extent -1.52,-1.24 1.04,1.24, body extent -0.78,-0.98 0.78,0.98, height 0.5
YZV4_TEX [mm]
  round 0.305 smd paste+0 mask+0: A1(-0.25,0.25) A2(0.25,0.25) B1(-0.25,-0.25) B2(0.25,-0.25)
  body extent -0.47,-0.47 0.47,0.47, height 0.49